# Altium PCB pcb.PcbDoc
Units mil, origin at the board's own origin, x right, y up, seen from the top; angles counter-clockwise.
Board outline 2952.76 x 2952.76 mil, 4 copper layers (Top Layer, GND, Int, Bottom Layer), stack 63.233 mil thick; 94 components, 54 nets, 351 pads, 69 vias.
Unrouted connection lines stored in the file: 112.
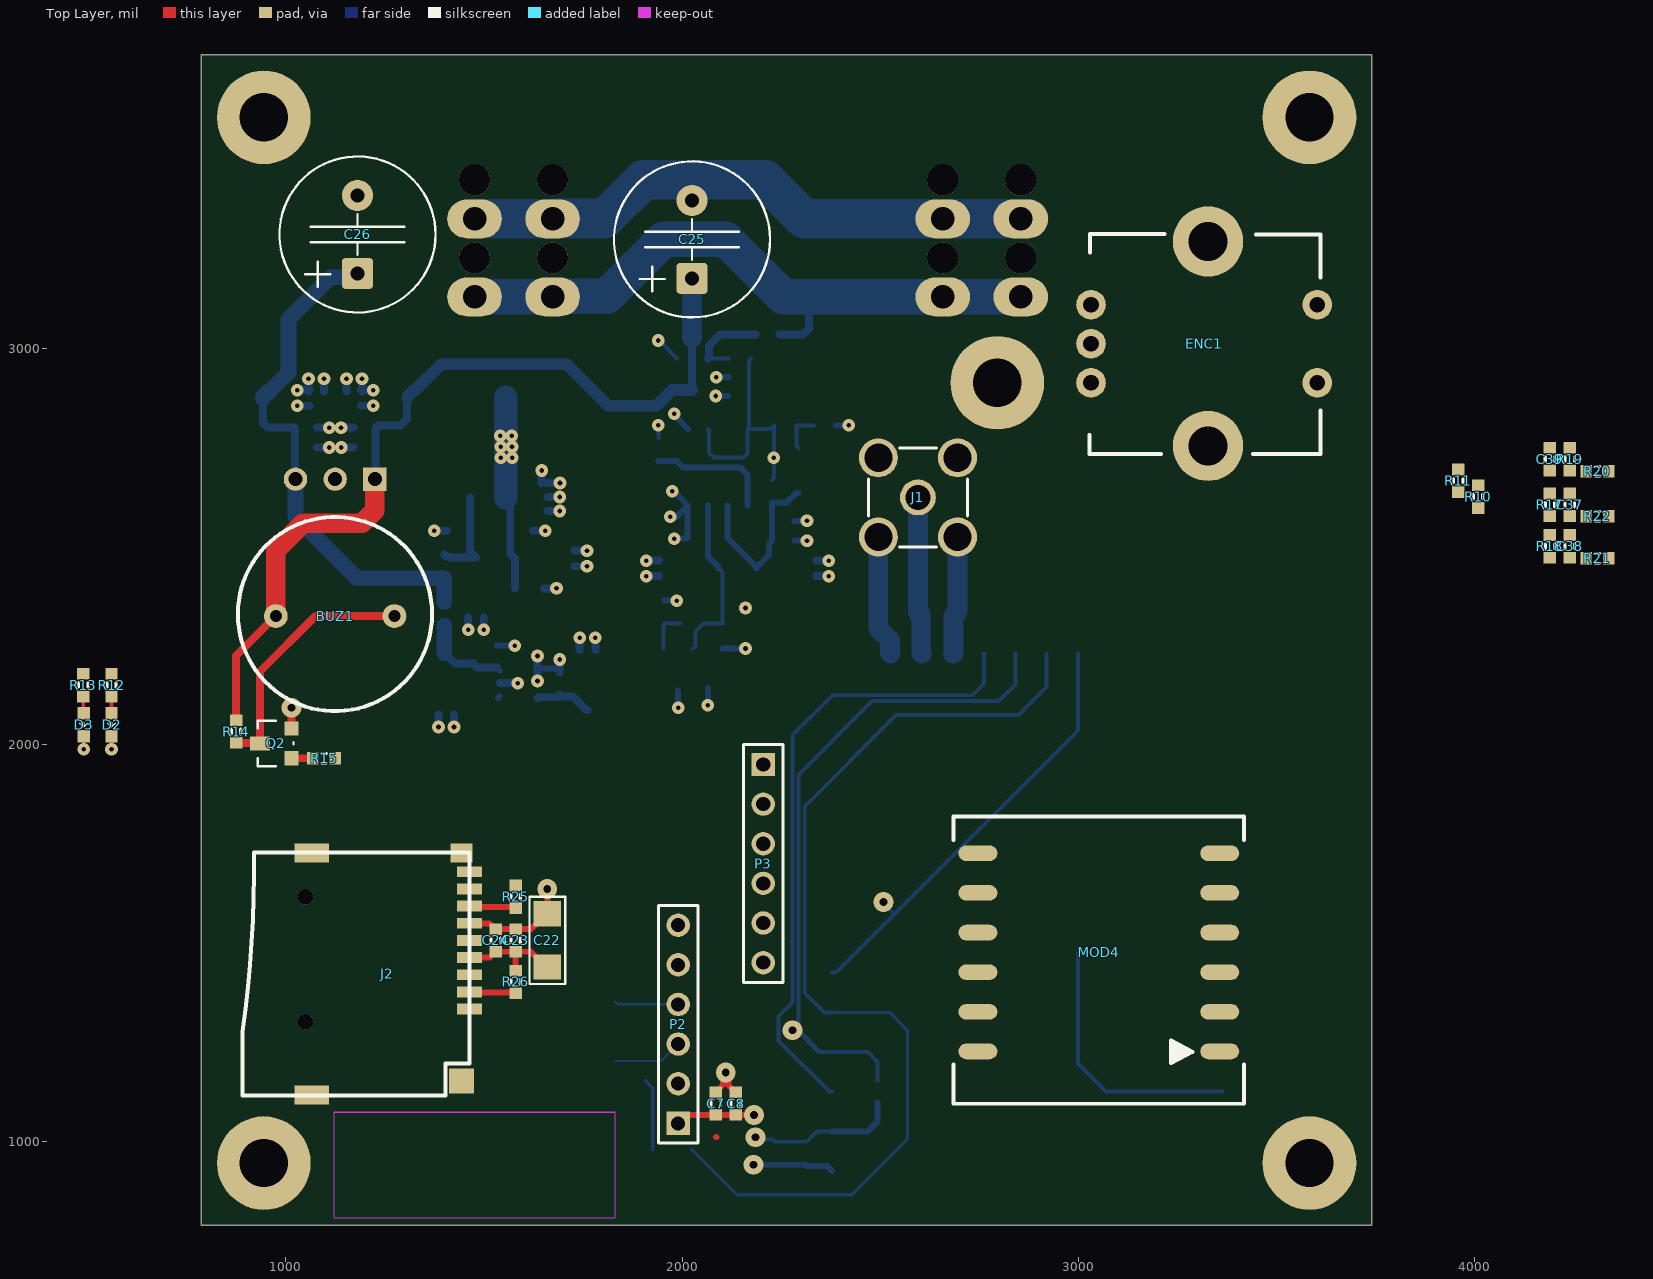
[diagram p0: Top Layer view]
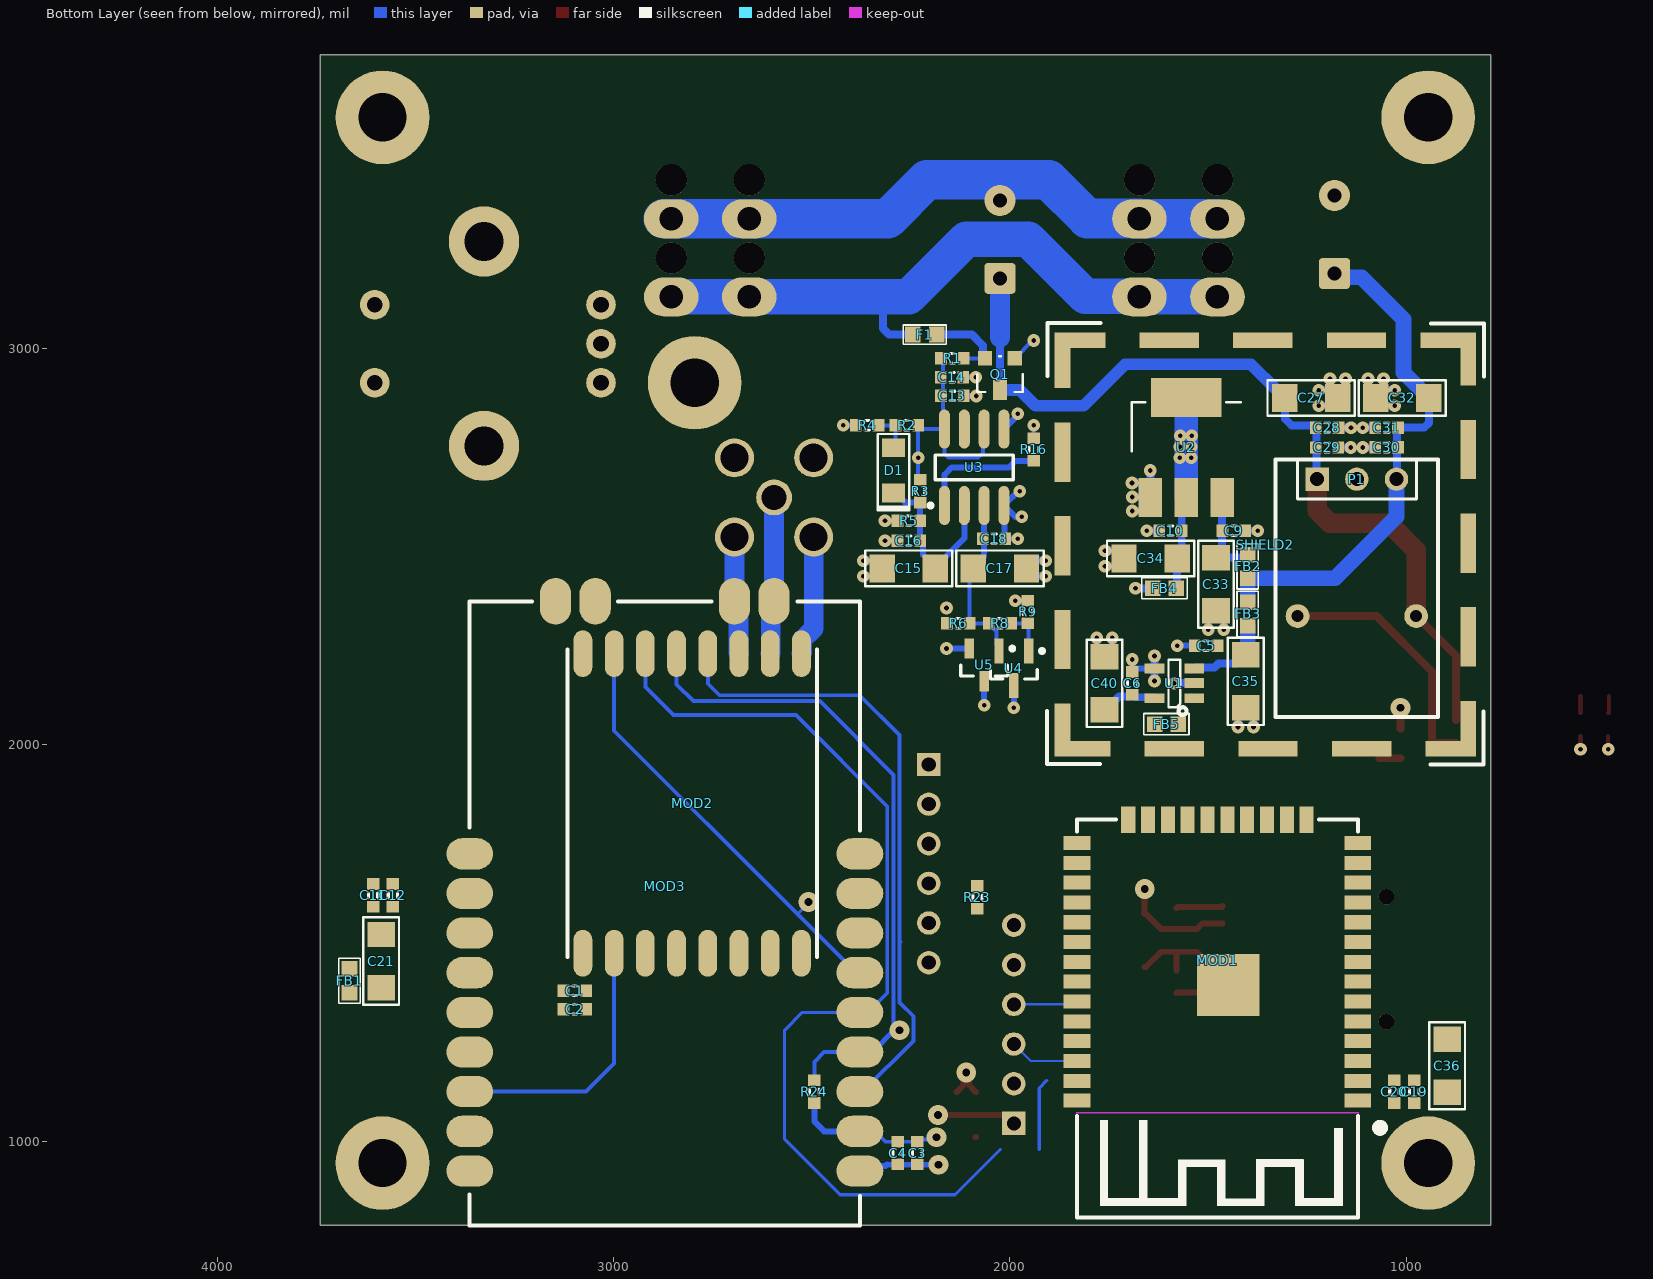
[diagram p1: Bottom Layer view, seen from below]
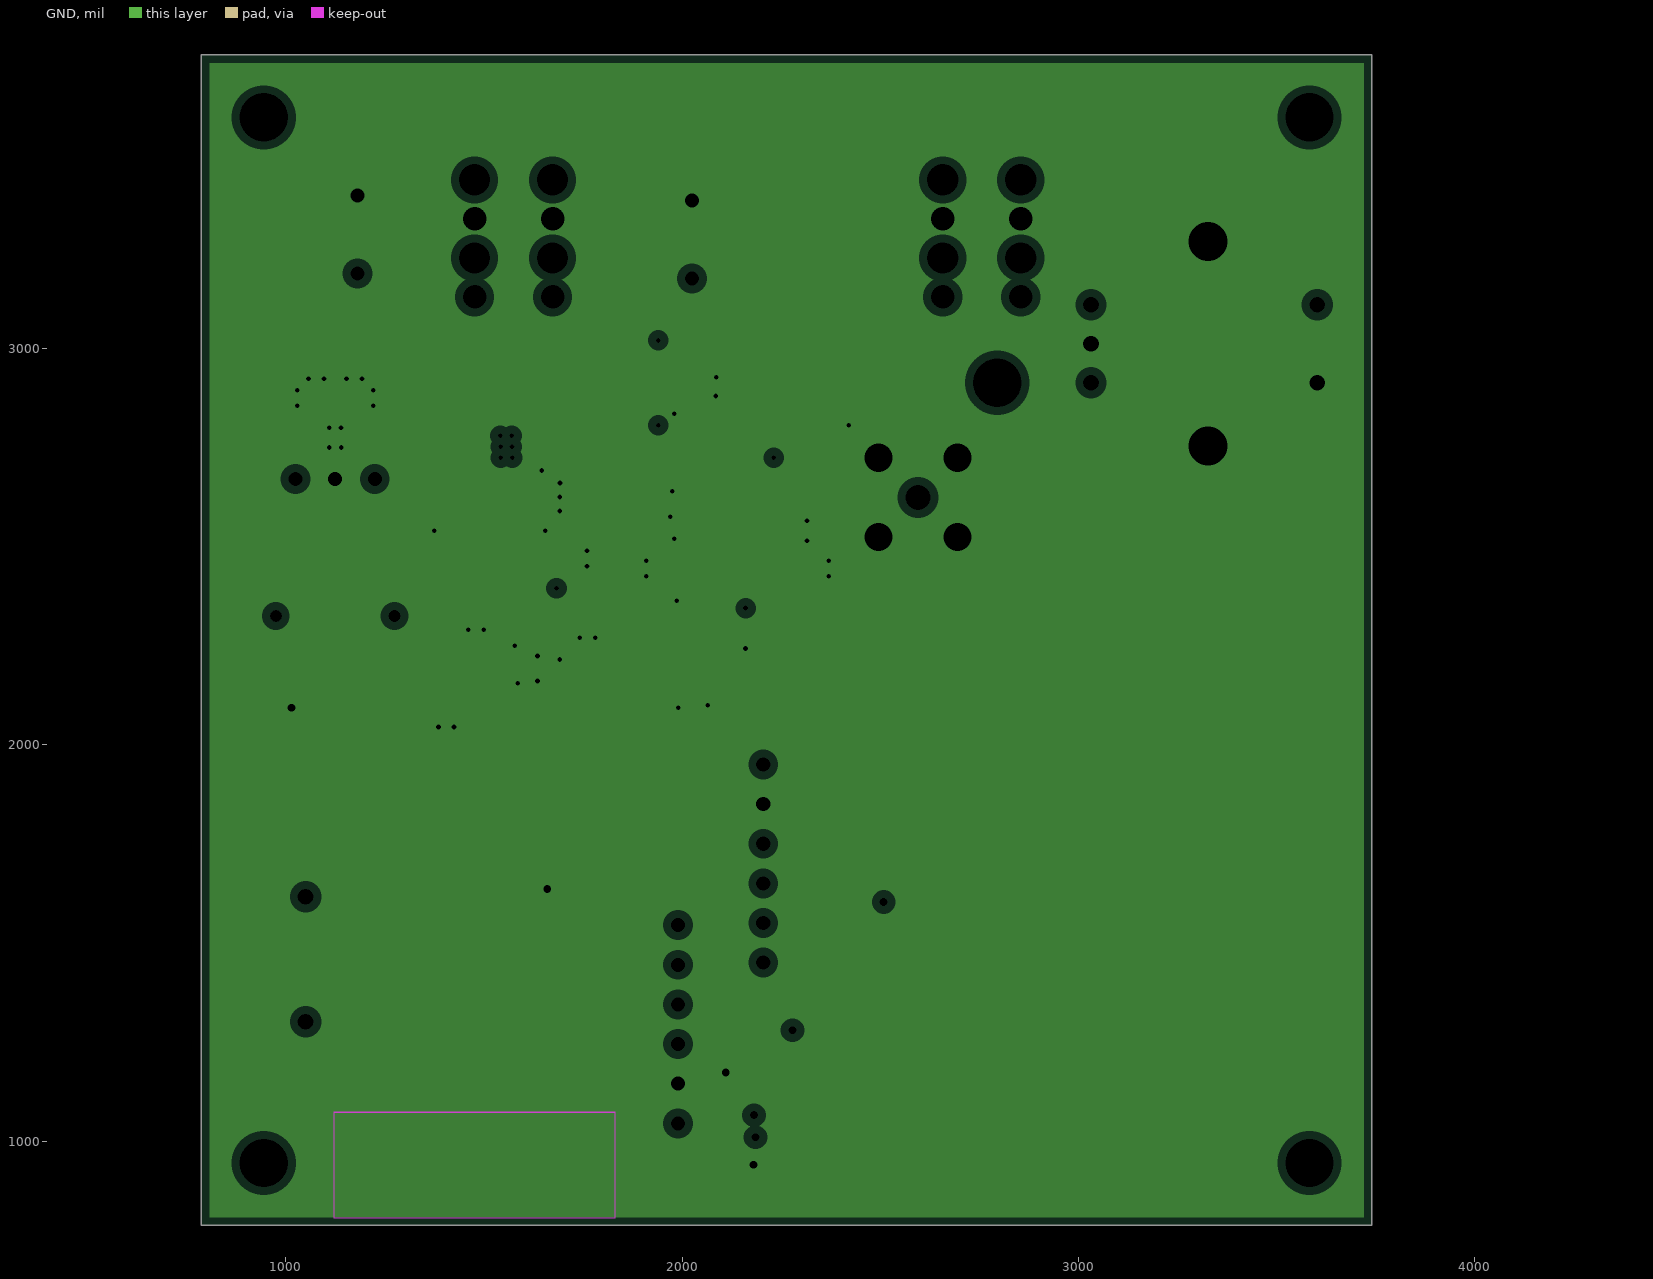
[diagram p2: GND, clearances drawn from the general rule]
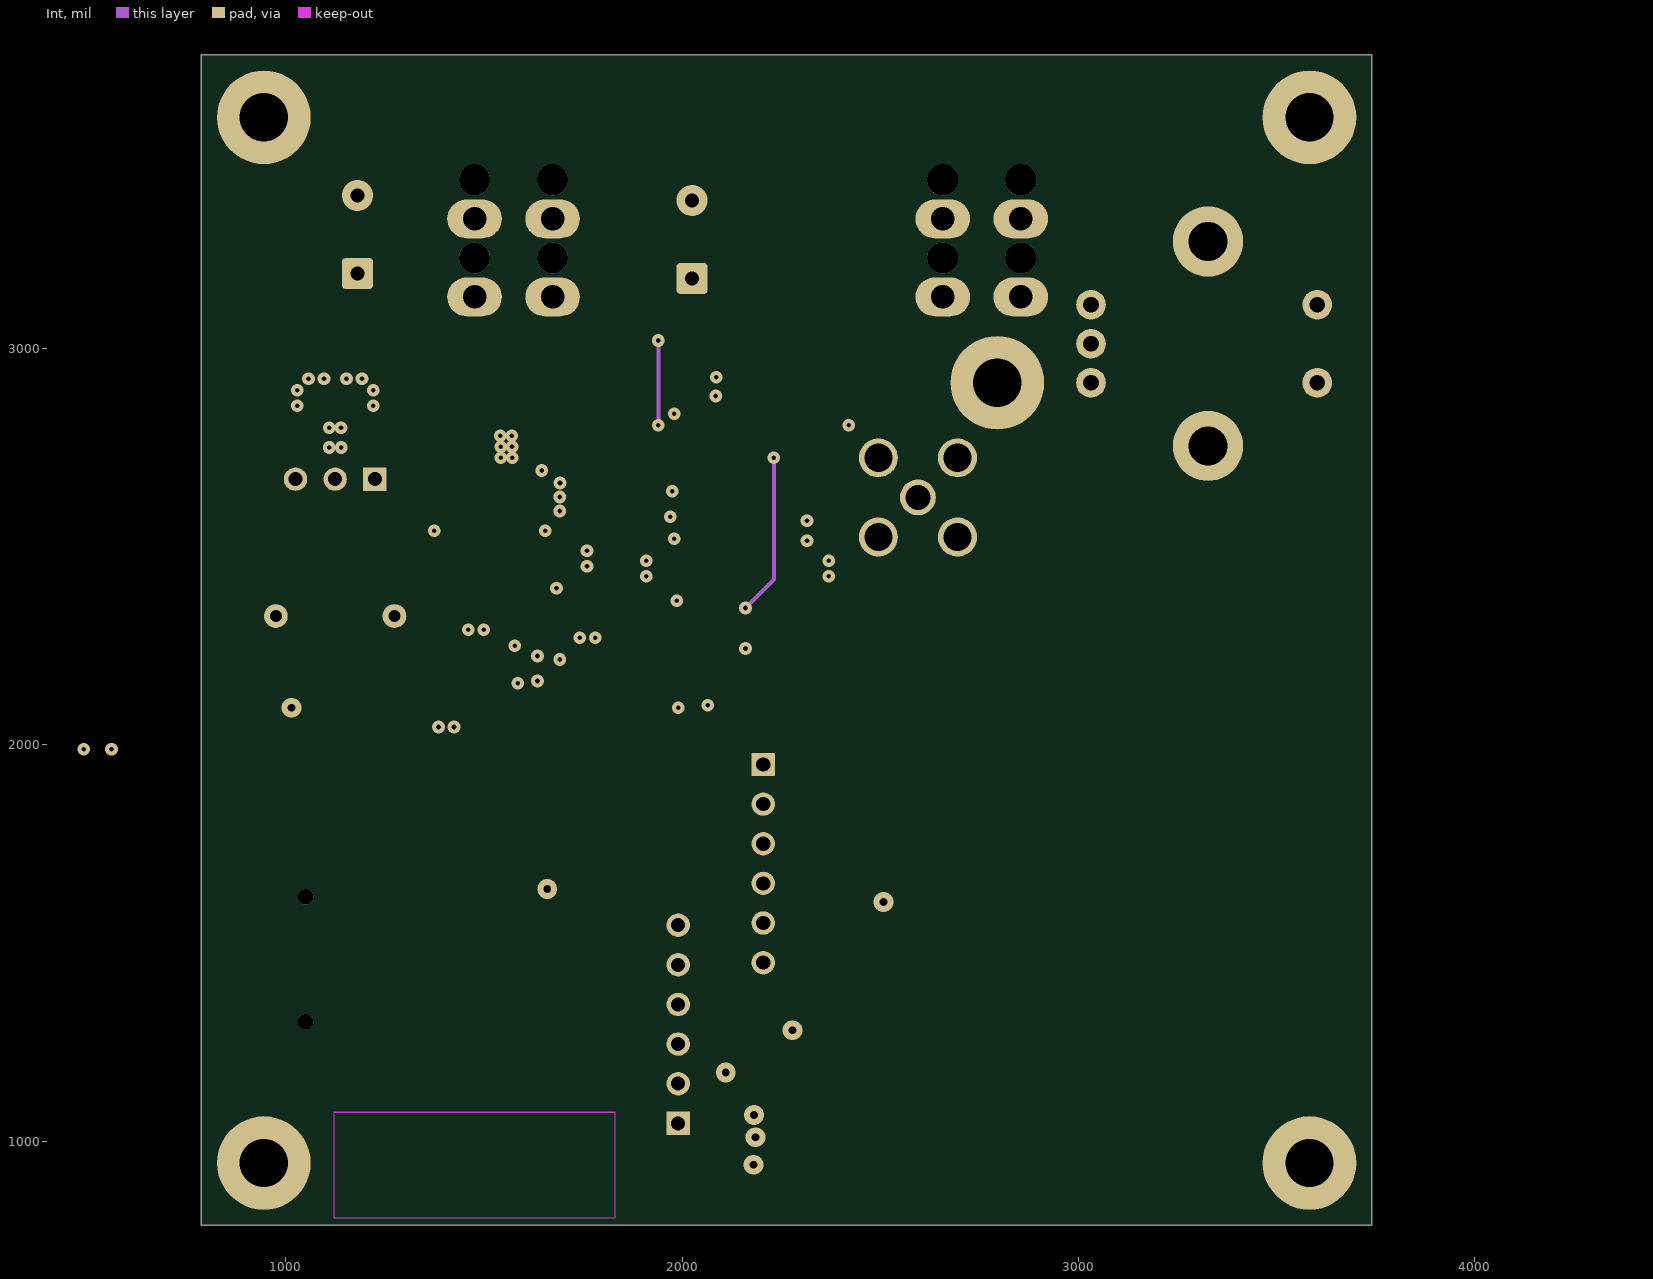
[diagram p3: Int]

## Layer stack, top to bottom
Top Solder: solder mask 0.4, Solder Resist, Dk 3.5
Top Layer: signal copper 1.4
Dielectric 2: prepreg 7.874, PP-006, Dk 4.1
GND: plane copper 1.378, net GND
Dielectric 3: prepreg 41.9291, PP-006, Dk 4.1
Int: signal copper 1.378
Dielectric 1: dielectric 7.874, FR-4, Dk 4.8
Bottom Layer: signal copper 1.4
Bottom Solder: solder mask 0.4, Solder Resist, Dk 3.5

## Board outline
787.4,787.4 3740.16,787.4 3740.16,3740.16 787.4,3740.16

## Design rules (kind name [scope] priority, off if disabled: settings)
BoardOutlineClearance [OnBottomLayer  Or OnTopLayer] p1: gap=11.81 ignorepadtopadclearanceinfootprint=FALSE
Clearance [All] p1: gap=5 ignorepadtopadclearanceinfootprint=TRUE except(10: Arc-Poly Track-Poly SMDPad-Poly THPad-Poly Via-Poly Fill-Poly Poly-Poly Poly-Region Poly-Text Poly-Hole)
ComponentClearance [InComponent('MOD2')] p1: gap=0 collisioncheckmode=3 verticalgap=0 showdistances=FALSE
ComponentClearance ComponentClearance_2 [InComponent('MOD3')] p2: gap=0 collisioncheckmode=3 verticalgap=0 showdistances=FALSE
ComponentClearance ComponentClearance_1 [All] p3: gap=10 collisioncheckmode=3 verticalgap=10 showdistances=FALSE
Height [All] p1: minheight=0 maxheight=1500 prefheight=500
HoleSize [All] p1: absolutevalues=TRUE maxlimit=100 minlimit=11.81 maxpercent=80.000 minpercent=20.000
MinimumAnnularRing [All] p1: minimumring=6
MinimumSolderMaskSliver [All] p1: minsoldermaskwidth=0
PlaneClearance [All] p1: clearance=20
PlaneConnect [All] p1: planeconnectstyle=Direct reliefexpansion=20 reliefentries=4 reliefconductorwidth=10 reliefairgap=10
PolygonConnect [All] p1: connectstyle=Direct reliefconductorwidth=10 reliefentries=4 polygonreliefangle="90 Angle" airgapwidth=10
RoutingVias [All] p1: holewidth=11.81 width=32 viastyle="Through Hole" minholewidth=11.81 minwidth=32 maxholewidth=19.68 maxwidth=100
SilkToSilkClearance [All] p1: silktosilkclearance=0
SilkToSolderMaskClearance [IsPad] p1: minsilkscreentomaskgap=0 clearancetoexposedcopper=TRUE
SolderMaskExpansion [All] p1: expansion=4 istentingtop=FALSE
Width [All] p1: maxlimit=1000 minlimit=5 preferedwidth=10 minimp=50.000000 maximp=50.000000 favimp=50.000000
22 further rules are at their usual default settings.

## Classes and differential pairs
component class power: C5 C6 C9 C10 C13 C14 C15 C16 C17 C18 C25 C26 C27 C28 C29 C30 C31 C32 C33 C34 C35 C40 D1 F1 FB2 FB3 FB4 FB5 P1 Q1 R1 R2 R3 R4 R5 R6 R8 R9 R16 SHIELD1 SHIELD2 U1 U2 U3 U4 U5
component class main: BUZ1 C1 C2 C3 C4 C7 C8 C11 C12 C19 C20 C21 C22 C23 C24 C36 C37 C38 C39 D2 D3 ENC1 FB1 J1 J2 MOD1 MOD2 MOD3 MOD4 P2 P3 Q2 R10 R11 R12 R13 R14 R15 R17 R18 R19 R20 R21 R22 R23 R24 R25 R26

## Components (designator, comment, footprint, x,y, rotation, side; value= is the part's Value field where it differs from the comment)
BUZ1 "Buzzer" BUZ_BPT14X 1124.69,2324.76 r180 top value=BPT-14X
C1 "Ceramic X7R" C_0603_1608 3097.6,1378.94 r0 bottom value=1uF
C2 "Ceramic X7R" C_0603_1608 3097.6,1333.27 r0 bottom value=100nF
C3 "Ceramic X7R" C_0603_1608 2233.43,970 r270 bottom value=1uF
C4 "Ceramic X7R" C_0603_1608 2283.43,970 r270 bottom value=100nF
C5 "Ceramic X7R" C_0603_1608 1505,2250 r0 bottom value=1uF
C6 "Ceramic X7R" C_0603_1608 1691.31,2155 r90 bottom value=1uF
C7 "Ceramic X7R" C_0603_1608 2085,1095 r90 top value=100nF
C8 "Ceramic X7R" C_0603_1608 2135,1095 r90 top value=1uF
C9 "Ceramic X7R" C_0603_1608 1435,2540 r180 bottom value=1uF
C10 "Ceramic X7R" C_0603_1608 1595,2540 r0 bottom value=1uF
C11 "Ceramic X7R" C_0603_1608 3606.46,1620.04 r90 bottom value=1uF
C12 "Ceramic X7R" C_0603_1608 3556.46,1620.04 r90 bottom value=100nF
C13 "Ceramic X7R" C_0603_1608 2145,2880 r180 bottom value=1uF
C14 "Ceramic X7R" C_0603_1608 2146.18,2927.56 r180 bottom value=100nF
C15 "Ceramic X7R" C_1206_3216 2255,2445 r0 bottom value=10uF
C16 "Ceramic X7R" C_0603_1608 2255,2515 r0 bottom value=1uF
C17 "Ceramic X7R" C_1206_3216 2025,2445 r180 bottom value=10uF
C18 "Ceramic X7R" C_0603_1608 2040,2520 r180 bottom value=1uF
C19 "Ceramic X7R" C_0603_1608 980,1125 r270 bottom value=1uF
C20 "Ceramic X7R" C_0603_1608 1030,1125 r270 bottom value=100nF
C21 "Ceramic X7R" C_1206_3216 3586.02,1454.49 r270 bottom value=10uF
C22 "Ceramic X7R" C_1206_3216 1660,1506.42 r90 top value=10uF
C23 "Ceramic X7R" C_0603_1608 1580,1506.42 r90 top value=1uF
C24 "Ceramic X7R" C_0603_1608 1530,1506.42 r90 top value=100nF
C25 "Electrolytic Capacitor" C_10x16x5 2025,3275 r90 top value=680uF
C26 "Electrolytic Capacitor" C_10x16x5 1181.1,3287.4 r90 top value=680uF
C27 "Ceramic X7R" C_1206_3216 1240,2875 r180 bottom value=10uF
C28 "Ceramic X7R" C_0603_1608 1199.69,2800.16 r180 bottom value=1uF
C29 "Ceramic X7R" C_0603_1608 1200,2750 r180 bottom value=100nF
C30 "Ceramic X7R" C_0603_1608 1049.69,2750.16 r0 bottom value=100nF
C31 "Ceramic X7R" C_0603_1608 1049.69,2800.16 r0 bottom value=1uF
C32 "Ceramic X7R" C_1206_3216 1010,2875 r0 bottom value=10uF
C33 "Ceramic X7R" C_1206_3216 1480,2405 r270 bottom value=10uF
C34 "Ceramic X7R" C_1206_3216 1645,2470 r0 bottom value=10uF
C35 "Ceramic X7R" C_1206_3216 1405,2160 r270 bottom value=10uF
C36 "Ceramic X7R" C_1206_3216 896.92,1190.19 r270 bottom value=10uF
C37 "Ceramic C0G" C_0603_1608 4239.13,2605.59 r90 top value=1nF
C38 "Ceramic C0G" C_0603_1608 4239.13,2500.59 r90 top value=1nF
C39 "Ceramic C0G" C_0603_1608 4189.13,2720.59 r90 top value=1nF
C40 "Ceramic X7R" C_1206_3216 1761.31,2155 r90 bottom value=10uF
D1 "BAS40H" SOD123 2293.54,2692.09 r90 bottom value=BAS40H,115
D2 "Green Led" OL_0603_1608 560.51,2050.58 r90 top value=LTST-C190TGKT
D3 "Red Led" OL_0603_1608 490.51,2050.58 r90 top value=LTST-C190KRKT
ENC1 "ENCODER" PEC12R-4xxxF-Sxxxx 3326.77,3011.81 r270 top value=PEC12R-4025F-S0024
F1 "Fuse" F_0603_1608 2215,3035 r180 bottom value=SF-0603F050-2
FB1 "Ferrite bead" FB_0603_1608 3666.02,1404.49 r90 bottom value=BLM18AG601SN1
FB2 "Ferrite bead" FB_0603_1608 1400,2450 r90 bottom value=BLM18AG601SN1
FB3 "Ferrite bead" FB_0603_1608 1400,2330 r270 bottom value=BLM18AG601SN1
FB4 "Ferrite bead" FB_0603_1608 1610,2395 r0 bottom value=BLM18AG601SN1
FB5 "Ferrite bead" FB_0603_1608 1605.08,2051.94 r180 bottom value=BLM18AG601SN1
J1 "SMA VERTICAL" J_SMA_VERTICAL 2594.96,2624.02 r270 top value=901-144-8RFX
J2 "SH-BI-270" PCB-mlvdq0q3kywtagbkwbjh-1 1050,1459.17 r270 top
MOD1 "2.4 GHz Wi-Fi-and-Bluetooth combo chip" MOD_ESP_WROOM_32 1476.38,1427.36 r0 bottom value=ESP32-WROOM-32
MOD2 "868 MHz RFM69HW RF Sub-GHz Transceiver Module" MOD_RFM69HW 2801.54,1852.05 r90 bottom locked value=RFM69HW-868S2
MOD3 "1W 868 MHz LoRa" MOD_E19-868M30S 2378.43,925 r90 bottom locked value=E19-868M30S
MOD4 "GPS with Patch antenna" MOD_L86-M33 3051.18,1476.38 r0 top value=L86-M33
P1 "Goldpin" P_HEADER_1x3_2.54 1224.69,2670.16 r180 bottom value=DS1021-1*3SF1-1
P2 "Goldpin" P_HEADER_1x6_2.54 1990,1045 r90 top value=DS1021-1*6SF1-1
P3 "Goldpin" P_HEADER_1x6_2.54 2204.72,1950.39 r270 top value=DS1021-1*6SF1-1
Q1 "DMG2307L" SOT23_TO236_SC59 2025,2935 r0 bottom
Q2 "2N7002K-7" SOT23_TO236_SC59 974.76,2003.46 r90 top
R1 "Resistor" R_0603_1608 2145,2975 r180 bottom value=10R
R2 "Resistor" R_NC_0603_1608 2260,2805.91 r180 bottom value=NC
R3 "Resistor" R_NC_0603_1608 2226.46,2640 r90 bottom value=NC
R4 "Resistor" R_NC_0603_1608 2360,2805.91 r180 bottom value=NC
R5 "Resistor" R_NC_0603_1608 2255,2565 r180 bottom value=NC
R6 "Resistor" R_NC_0603_1608 2130,2306.46 r0 bottom value=NC
R8 "Resistor" R_NC_0603_1608 2025,2306.46 r0 bottom value=NC
R9 "Resistor" R_NC_0603_1608 1955,2335 r270 bottom value=NC
R10 "Resistor" R_0603_1608 4007.83,2626.1 r270 top value=10k
R11 "Resistor" R_0603_1608 3957.83,2666.1 r90 top value=10k
R12 "Resistor" R_0603_1608 560.51,2150.58 r90 top value=1k
R13 "Resistor" R_0603_1608 489.21,2150.58 r90 top value=1k
R14 "Resistor" R_0603_1608 874.76,2033.46 r90 top value=1k
R15 "Resistor" R_0603_1608 1096.67,1965.96 r180 top value=100R
R16 "Resistor" R_0603_1608 1940,2745 r90 bottom value=100R
R17 "Resistor" R_0603_1608 4189.13,2605.59 r270 top value=10k
R18 "Resistor" R_0603_1608 4189.13,2500.59 r270 top value=10k
R19 "Resistor" R_0603_1608 4239.13,2720.59 r270 top value=10k
R20 "Resistor" R_0603_1608 4309.13,2690.59 r180 top value=100R
R21 "Resistor" R_0603_1608 4309.13,2470.59 r180 top value=100R
R22 "Resistor" R_0603_1608 4309.13,2577.05 r180 top value=100R
R23 "Resistor" R_0603_1608 2081.89,1615 r270 bottom value=10k
R24 "Resistor" R_0603_1608 2493.43,1125 r90 bottom value=10k
R25 "Resistor" R_0603_1608 1580,1616.65 r270 top value=10k
R26 "Resistor" R_0603_1608 1580,1401.69 r270 top value=10k
SHIELD1 "EMI Shield Cover" BMI-S-203-C 4681.1,5901.57 r0 top value=BMI-S-203-C
SHIELD2 "EMI Shield" BMI-S-203-F 1355.28,2508.5 r0 bottom locked value=BMI-S-203-F
U1 "LP5907MFX-3.0" SOT23-5_SC74A_SOT753_M 1585,2155 r90 bottom value=LP5907MFX-3.0/NOPB
U2 "LD1117AS33TR" SOT223_SC73 1555,2750 r180 bottom
U3 "TS3702CDT" SOP8_SO8_SOIC8_4X5X18 2090,2700 r90 bottom
U4 "LM4041CIM3-ADJ/NOPB" MF03A_M 1990,2193.31 r270 bottom
U5 "LM4041AIM3-1.2/NOPB" MF03A_N 2064.86,2201.36 r270 bottom

## Footprints (in the part's own frame and the unit in brackets; to place one, negate y for a bottom-side part, rotate by r counter-clockwise, add the part's x,y. Pads: shape width x height; smd on the part's side, far side on the other; paste and mask are expansions set on the pad)
BMI-S-203-C [mil]
  body extent -525,-525 525,525, height 39
BMI-S-203-F [mm]
  rect 1x3.24 smd: 1(-13.005,-11.72) 1(13.005,11.885)
  rect 1x3.8 smd: 1(-13.005,-6) 1(-13.005,0) 1(-13.005,6) 1(13.005,-5.835) 1(13.005,0.165) 1(13.005,6.165)
  rect 1x3.57 smd: 1(-13.005,11.885) 1(13.005,-11.72)
  rect 3.24x1 smd: 1(-11.885,13.17) 1(11.885,-13.005)
  rect 3.57x1 smd: 1(-11.72,-13.005) 1(11.72,13.17)
  rect 3.8x1 smd: 1(-6.165,13.17) 1(-5.835,-13.005) 1(-0.165,13.17) 1(0.165,-13.005) 1(5.835,13.17) 1(6.165,-13.005)
  silkscreen extent -14,-14.1 14,14.17, body extent -13.06,-13.06 13.15,13.15, height 5.08
BUZ_BPT14X [mil] "buzzer"
  round 60 hole 30: 1(149.61,0) 2(-149.61,0)
  silkscreen extent -245,-250 245,240, body extent -235,-236 238,236, height 295
C_10x16x5 [mm]
  rrect25% 2x2 hole 0.9: 1(-2.5,0)
  round 2 hole 0.9: 2(2.5,0)
  silkscreen extent -5,-5 5,5, body extent -4.96,-4.97 4.95,4.96, height 20
C_0603_1608 [mm]
  rect 0.75x0.8 smd: 1(-0.725,0) 2(0.725,0)
  silkscreen extent -0.15,-0.3 0.15,0.3, body extent -0.85,-0.45 0.85,0.45, height 0.89
C_1206_3216 [mil]
  rect 64x70 smd: 1(-67,0) 2(67,0)
  silkscreen extent -110,-45 110,45, body extent -67,-35 67,35, height 39
F_0603_1608 [mil]
  rect 39x40 smd: 1(-30,0) 2(30,0)
  silkscreen extent -54,-24 54,24, body extent -31,-16 31,16, height 32
FB_0603_1608 [mil]
  rect 39x40 smd: 1(-30,0) 2(30,0)
  silkscreen extent -57,-27 57,27, body extent -34,-19 34,19, height 21
J_SMA_VERTICAL [mm]
  round 2.3 hole 1.6: 1(0,0)
  round 2.5 hole 1.8: 2(-2.54,2.54) 2(-2.54,-2.54) 2(2.54,2.54) 2(2.54,-2.54)
  silkscreen extent -3.18,-3.18 3.18,3.18, body extent -3.17,-3.17 3.18,3.18, height 9.5
MF03A_M [mm] "SOT23, 3-Leads, Body 2.9x1.3mm, Pitch 0.95mm, Lead Span 2.4mm, IPC Low Density"
  rect 1.6x0.6 smd: 1(-1.1,0.95) 2(-1.1,-0.95) 3(1.1,0)
  silkscreen extent -1.22,-1.5 0.7,1.92, body extent -0.7,-1.52 0.7,1.52, height 1.12
MF03A_N [mm] "SOT23, 3-Leads, Body 2.9x1.3mm, Pitch 0.95mm, Lead Span 2.4mm, IPC Medium Density"
  rect 1.3x0.6 smd: 1(-1.05,0.95) 2(-1.05,-0.95) 3(1.05,0)
  silkscreen extent -1.17,-1.5 0.7,1.92, body extent -0.7,-1.52 0.7,1.52, height 1.12
MOD_E19-868M30S [mm]
  oval 2x3 smd: 1(20.32,25) 2(17.78,25) 3(15.24,25) 4(12.7,25) 5(10.16,25) 6(7.62,25) 7(5.08,25) 8(2.54,25) 9(0,25) 10(0,0) 11(2.54,0) 12(5.08,0) 13(7.62,0) 14(10.16,0) 15(12.7,0) 16(15.24,0) 17(17.78,0) 18(20.32,0)
  oval 3x2 smd: 19(36.5,5.5) 20(36.5,8.04) 21(36.5,16.96) 22(36.5,19.5)
  silkscreen extent -3.5,0 36.5,25, body extent -3.5,0 36.5,25, height 5.45
MOD_ESP_WROOM_32 [mm] "Normal"
  rect 1.7x0.9 smd: 1(-9,8.255) 2(-9,6.985) 3(-9,5.715) 4(-9,4.445) 5(-9,3.175) 6(-9,1.905) 7(-9,0.635) 8(-9,-0.635) 9(-9,-1.905) 10(-9,-3.175) 11(-9,-4.445) 12(-9,-5.715) 13(-9,-6.985) 14(-9,-8.255) 25(9,-8.255) 26(9,-6.985) 27(9,-5.715) 28(9,-4.445) 29(9,-3.175) 30(9,-1.905) 31(9,-0.635) 32(9,0.635) 33(9,1.905) 34(9,3.175) 35(9,4.445) 36(9,5.715) 37(9,6.985) 38(9,8.255)
  rect 0.9x1.7 smd: 15(-5.715,-9.755) 16(-4.445,-9.755) 17(-3.175,-9.755) 18(-1.905,-9.755) 19(-0.635,-9.755) 20(0.635,-9.755) 21(1.905,-9.755) 22(3.175,-9.755) 23(4.445,-9.755) 24(5.715,-9.755)
  rect 4x4 smd: EP1(-0.7,0.845)
  Keep-Out Layer region: -9.024,15.75 9,15.75 9,9.024 -9.024,9.024
  Keep-Out Layer region: -9.012,15.75 9,15.75 9,9.012 -9.012,9.012
  Keep-Out Layer region: -9.026,15.75 9,15.75 9,9.026 -9.026,9.026
  Keep-Out Layer region: -9.024,15.75 9,15.75 9,9.024 -9.024,9.024
  Keep-Out Layer region: -9.012,15.75 9,15.75 9,9.012 -9.012,9.012
  Keep-Out Layer region: -9.026,15.75 9,15.75 9,9.026 -9.026,9.026
  Keep-Out Layer region: -9.024,15.75 9,15.75 9,9.024 -9.024,9.024
  Keep-Out Layer region: -9.012,15.75 9,15.75 9,9.012 -9.012,9.012
  Keep-Out Layer region: -9.026,15.75 9,15.75 9,9.026 -9.026,9.026
  silkscreen extent -10.67,-9.75 9,15.75, body extent -9.05,-9.77 9.02,15.77, height 3
MOD_L86-M33 [mm]
  oval 2.5x1 smd: 1(7.75,-6.35) 2(7.75,-3.81) 3(7.75,-1.27) 4(7.75,1.27) 5(7.75,3.81) 6(7.75,6.35) 7(-7.75,6.35) 8(-7.75,3.81) 9(-7.75,1.27) 10(-7.75,-1.27) 11(-7.75,-3.81) 12(-7.75,-6.35)
  silkscreen extent -9.3,-9.7 9.3,8.7, body extent -9.15,-9.7 9.25,8.7, height 7.05
MOD_RFM69HW [mm]
  oval 3x1.2 smd: 1(-9.6,7) 2(-9.6,5) 3(-9.6,3) 4(-9.6,1) 5(-9.6,-1) 6(-9.6,-3) 7(-9.6,-5) 8(-9.6,-7) 9(9.6,-7) 10(9.6,-5) 11(9.6,-3) 12(9.6,-1) 13(9.6,1) 14(9.6,3) 15(9.6,5) 16(9.6,7)
  silkscreen extent -9.85,-8 9.85,8, body extent -9.85,-8 9.85,8, height 1.9
OL_0603_1608 [mm]
  rect 0.8x0.8 smd: 1(-0.75,0) 2(0.75,0)
  silkscreen extent -0.15,-0.25 0.15,0.25, body extent -0.8,-0.4 0.8,0.4, height 0.75
P_HEADER_1x3_2.54 [mm] "Connector; Header; 3 Position, Male"
  rect 1.5x1.5 hole 0.9: 1(0,0)
  round 1.5 hole 0.9: 2(2.54,0) 3(5.08,0)
  silkscreen extent -1.27,-1.27 6.35,1.27, body extent -1.17,-1.25 6.45,1.25, height 8.2
P_HEADER_1x6_2.54 [mm] "Connector; Header; 6 Position, Male"
  rect 1.5x1.5 hole 0.9: 1(0,0)
  round 1.5 hole 0.9: 2(2.54,0) 3(5.08,0) 4(7.62,0) 5(10.16,0) 6(12.7,0)
  silkscreen extent -1.27,-1.27 13.97,1.27, body extent -1.17,-1.25 14.07,1.25, height 8.2
PCB-mlvdq0q3kywtagbkwbjh-1 [mm]
  round 1 hole 1: 1(-4,0) 1(4,0)
  rect 0.7x1.6 smd: 1(3.2,10.5) 2(2.1,10.5) 3(1,10.5) 4(-0.1,10.5) 6(-2.3,10.5) 7(-3.4,10.5) 8(-4.5,10.5) CD(-5.6,10.5)
  rect 0.7x1.6 smd mask+0.102: 5(-1.2,10.5)
  rect 1.2x2.2 smd: H(-6.8,0.4) H(8.7,0.4)
  rect 1.6x1.6 smd: H(7.8,10)
  rect 1.2x1.4 smd: S0(-6.8,10)
  silkscreen extent -6.83,-4.03 8.74,10.5, body extent -7.1,-5.89 9,11.31, height 2.2
PEC12R-4xxxF-Sxxxx [mm]
  round 1.9 hole 1: 1(-2.5,-7.5) 2(0,-7.5) 3(2.5,-7.5) 4(-2.5,7) 5(2.5,7)
  round 4.5 hole 2.5: EP1(6.55,0) EP2(-6.55,0)
  silkscreen extent -7.04,-7.59 7.06,7.21, body extent -7.98,-7.5 7,7.92, height 35.01
R_0603_1608 [mm]
  rect 0.75x0.8 smd: 1(-0.725,0) 2(0.725,0)
  silkscreen extent -0.15,-0.3 0.15,0.3, body extent -0.87,-0.47 0.88,0.48, height 0.54
R_NC_0603_1608 [mm]
  rect 0.75x0.8 smd: 1(-0.725,0) 2(0.725,0)
  silkscreen extent -0.15,-0.3 0.15,0.3, body extent -0.87,-0.47 0.88,0.48, height 0.54
SOD123 [mm]
  rect 1.2x1.5 smd: 1(-1.45,0) 2(1.45,0)
  silkscreen extent -2.57,-1.02 2.34,1.02, body extent -1.86,-0.81 1.84,0.79, height 1.27
SOP8_SO8_SOIC8_4X5X18 [mm]
  oval 2.5x0.7 smd: 1(-2.45,1.905) 2(-2.45,0.635) 3(-2.45,-0.635) 4(-2.45,-1.905) 5(2.45,-1.905) 6(2.45,-0.635) 7(2.45,0.635) 8(2.45,1.905)
  silkscreen extent -2.57,-2.5 0.8,2.93, body extent -3,-2.45 3,2.45, height 1.7
SOT23-5_SC74A_SOT753_M [mil]
  rect 25x50 smd: 1(-37.5,-50) 2(0.5,-50) 3(37.5,-50) 4(37.5,50) 5(-37.5,50)
  silkscreen extent -80,-30 60,15, body extent -56,-53 59,57, height 57
SOT23_TO236_SC59 [mil]
  rect 36x36 smd: 1(-37.5,-40) 2(37.5,-40)
  rect 36x50 smd: 3(0,40)
  silkscreen extent -57,-45 58,45, body extent -57,-55 57,55, height 51
SOT223_SC73 [mm]
  rect 1.5x2.5 smd: 1(-2.3,-3.2) 2(0,-3.2) 3(2.3,-3.2)
  rect 4.5x2.5 smd: 4(0,3.2)
  silkscreen extent -3.5,-0.25 3.5,2.9, body extent -3.36,-3.55 3.34,3.75, height 1.8

## Part data
BUZ1: library part BUZ_BPT14X, Current=7mA, Manufacturer=Bestar, Manufacturer Part Number=BPT-14X, Voltage=3-16VDC, HelpURL=https://www.tme.eu/Document/2f32f2e796b26d1790fa80b84c10e428/bpt1412xh7_5_040200.pdf, Part Number=BUZ_BPT14X, SCH_Footprint=13.8x7.6, Supplier 1=TME, Supplier 2="RS Components", Supplier 3=Farnell, Supplier 4=Mouser, Supplier 5=Digi-Key, Supplier Part Number 1=BPT-14X
C1 C3 C5 C6 C8 C9 C10 C11 C13 C16 C18 C19 C23 C28 C31: library part C_1uF_25V_X7R_0603_10, "Capacitor", Dielectric=X7R, Manufacturer=Samsung, Manufacturer Part Number=CL10B105KA8NNNC, Tolerance (%)=10, Voltage=25V, HelpURL=http://www.tme.eu/pl/Document/4a42202b32dab16128fe107dd69598cc/samsung-chip-cap.pdf, Part Number=C_1uF_25V_X7R_0603_10, SCH_Footprint=0603, Supplier 1=TME, Supplier 2="RS Components", Supplier 3=Farnell, Supplier 4=Mouser, Supplier 5=Digi-Key, Supplier Part Number 1=CL10B105KA8NNNC
C2 C4 C7 C12 C14 C20 C24 C29 C30: library part C_100nF_50V_X7R_0603_5, "Capacitor", Dielectric=X7R, Manufacturer=Samsung, Manufacturer Part Number=CL10B104JB8NNNC, Tolerance (%)=5, Voltage=50V, HelpURL=http://www.tme.eu/pl/Document/4a42202b32dab16128fe107dd69598cc/samsung-chip-cap.pdf, Part Number=C_100nF_50V_X7R_0603_5, SCH_Footprint=0603, Supplier 1=TME, Supplier 2="RS Components", Supplier 3=Farnell, Supplier 4=Mouser, Supplier 5=Digi-Key, Supplier Part Number 1=CL10B104JB8NNNC
C15 C17 C21 C22 C27 C32 C33 C34 C35 C36 C40: library part C_10uF_25V_X7R_1206_10, "Capacitor", Dielectric=X7R, Manufacturer="Samsung Electro-Mechanics", Manufacturer Part Number=CL31B106KAHNNNE, Tolerance (%)=10, Voltage=25V, HelpURL=http://www.tme.eu/pl/Document/4a42202b32dab16128fe107dd69598cc/samsung-chip-cap.pdf, Part Number=C_10uF_25V_X7R_1206_10, SCH_Footprint=1206, Supplier 1=TME, Supplier 2="RS Components", Supplier 3=Farnell, Supplier 4=Mouser, Supplier 5=Digi-Key, Supplier Part Number 1=CL31B106KAHNNNE
C25 C26: library part CE_680uF_16V_10x16x5_LESR_20, "Polarized Capacitor", Dielectric=AL2O3, Manufacturer=Panasonic, Manufacturer Part Number=EEUFC1C681, Tolerance (%)=20, Voltage=16V, HelpURL=http://www.tme.eu/pl/Document/03efc9a050846e2e56a9cbbb3a5dd471/EEUFC0J221.pdf, Part Number=CE_680uF_16V_10x16x5_LESR_20, SCH_Footprint=Rx10x16x5, Supplier 1=TME, Supplier 2="RS Components", Supplier 3=Farnell, Supplier 4=Mouser, Supplier 5=Digi-Key, Supplier Part Number 1=EEUFC1C681
C37 C38 C39: library part C_1nF_50V_C0G_0603_5, "Capacitor", Dielectric=C0G, Manufacturer=Samsung, Manufacturer Part Number=CL10C102JB8NNNC, Tolerance (%)=5, Voltage=50V, HelpURL=http://www.tme.eu/pl/Document/7da762c1dbaf553c64ad9c40d3603826/mlcc_samsung.pdf, Part Number=C_1nF_50V_C0G_0603_5, SCH_Footprint=0603, Supplier 1=TME, Supplier 2="RS Components", Supplier 3=Farnell, Supplier 4=Mouser, Supplier 5=Digi-Key, Supplier Part Number 1=CL10C102JB8NNNC
D1: library part DS_BAS40H_0.12A_40V_SOD123, Current=0.12A, Manufacturer=Nexperia, Manufacturer Part Number=BAS40H,115, Voltage=40V, HelpURL=https://datasheet.octopart.com/BAS40H%2C115-Nexperia-datasheet-8446890.pdf, Part Number=DS_BAS40H_0.12A_40V_SOD123, SCH_Footprint=SOD123, Supplier 1=TME, Supplier 2="RS Components", Supplier 3=Farnell, Supplier 4=Mouser, Supplier 5=Digi-Key, Supplier Part Number 2=7816723P, Supplier Part Number 3=1757749, Supplier Part Number 4=771-BAS40H-T/R, Supplier Part Number 5=1727-3562-1-ND
D2: library part OL_G_0603, "LED GREEN", Manufacturer=Lite-On, Manufacturer Part Number=LTST-C190TGKT, HelpURL=https://datasheet.octopart.com/LTST-C190TGKT-Lite-On-datasheet-158437.pdf, Part Number=OL_G_0603, SCH_Footprint=0603, Supplier 1=TME, Supplier 2="RS Components", Supplier 3=Farnell, Supplier 4=Mouser, Supplier 5=Digi-Key, Supplier Part Number 1=LTST-C190TGKT, Supplier Part Number 2=6920997P, Supplier Part Number 4=859-LTST-C190TGKT, Supplier Part Number 5=160-2019-1-ND
D3: library part OL_R_0603, "LED_RED", Manufacturer=Lite-On, Manufacturer Part Number=LTST-C190KRKT, HelpURL=https://datasheet.octopart.com/LTST-C190KRKT-Lite-On-datasheet-158191.pdf, Part Number=OL_R_0603, SCH_Footprint=0603, Supplier 1=TME, Supplier 2="RS Components", Supplier 3=Farnell, Supplier 4=Mouser, Supplier 5=Digi-Key, Supplier Part Number 1=LTST-C190KRKT, Supplier Part Number 2=1769795, Supplier Part Number 4=859-LTST-C190KRKT, Supplier Part Number 5=160-1436-1-ND
ENC1: library part ENC_PEC12R-4025F-S0024, Manufacturer=Bourns, Manufacturer Part Number=PEC12R-4025F-S0024, HelpURL=https://datasheet.octopart.com/PEC12R-4025F-S0024-Bourns-datasheet-44395047.pdf, Part Number=ENC_PEC12R-4025F-S0024, SCH_Footprint=PEC12R-4xxxF-Sxxxx, Supplier 1=TME, Supplier 2="RS Components", Supplier 3=Farnell, Supplier 4=Mouser, Supplier 5=Digi-Key, Supplier Part Number 1=PEC12R-4025F-S0024, Supplier Part Number 2=789-9649, Supplier Part Number 3=2814036, Supplier Part Number 4=652-PEC12R-4025F-S24, Supplier Part Number 5=PEC12R-4025F-S0024-ND
F1: library part F_500mA_50V_0603, Current=500mA, Manufacturer=Bourns, Manufacturer Part Number=SF-0603F050-2, Voltage=50V, HelpURL=https://datasheet.octopart.com/SF-0603F050-2-Bourns-datasheet-16972401.pdf, Part Number=F_500mA_50V_0603, SCH_Footprint=0603, Supplier 1=TME, Supplier 2="RS Components", Supplier 3=Farnell, Supplier 4=Mouser, Supplier 5=Digi-Key, Supplier Part Number 2=6924965P, Supplier Part Number 3=1652130, Supplier Part Number 5=SF-0603F050-2CT-ND
FB1 FB2 FB3 FB4 FB5: library part FB_BLM18AG601SN1, "Ferrite Bead", Current=500mA, Manufacturer=Murata, Manufacturer Part Number=BLM18AG601SN1D, Resistance=600R, HelpURL=http://datasheet.octopart.com/BLM18AG601SN1D-Murata-datasheet-11743096.pdf, Part Number=FB_BLM18AG601SN1, SCH_Footprint=0603, Supplier 1=TME, Supplier 2="RS Components", Supplier 3=Farnell, Supplier 4=Mouser, Supplier 5=Digi-Key, Supplier Part Number 2=7241299P, Supplier Part Number 3=1515679, Supplier Part Number 4=81-BLM11A601S, Supplier Part Number 5=490-1014-1-ND
J1: library part J_SMA_VERTICAL, "SMA connector", Manufacturer="Amphenol RF", Manufacturer Part Number=901-144-8RFX, Component Type=Standard, HelpURL=http://www.mouser.com/ds/2/18/C901-144-8RFX-710432.pdf, Part Number=J_SMA_VERTICAL, SCH_Footprint="SMA VERTICAL", Supplier 1=TME, Supplier 2="RS Components", Supplier 3=Farnell, Supplier 4=Mouser, Supplier 5=Digi-Key, Supplier Part Number 3=1339820, Supplier Part Number 4=523-901-144-8RFX, Supplier Part Number 5=ARFX1231-ND
J2: library part CMP-xyn8wfk4aykgkvbxxkv0-5, "SH-BI-270 Chinese microSD socket", CustomComponentID=xyn8wfk4aykgkvbxxkv0
MOD1: library part MOD_ESP32-WROOM-32, Manufacturer=ESPRESSIF, Manufacturer Part Number=ESP32-WROOM-32, HelpURL=https://www.espressif.com/sites/default/files/documentation/esp32_datasheet_en.pdf, Part Number=MOD_ESP32-WROOM-32, SCH_Footprint=MOD_ESP_WROOM_32, Supplier 1=TME, Supplier 2="RS Components", Supplier 3=Farnell, Supplier 4=Mouser, Supplier 5=Digi-Key, Supplier Part Number 1=ESP32-WROOM-32, Supplier Part Number 2=169-7594, Supplier Part Number 4=356-ESP-WROOM-32, Supplier Part Number 5=1904-1010-1-ND
MOD2: library part MOD_RFM69HW_868MHz, "HopeRF RFM69HW ISM TRANSCEIVER MODULE V1.3", Manufacturer=HopeRF, Manufacturer Part Number=RFM69HW-868S2, HelpURL=https://www.hoperf.com/data/upload/portal/20190306/RFM69HW-V1.3%20Datasheet.pdf, Part Number=MOD_RFM69HW_868MHz, SCH_Footprint=19.7x16, Supplier 1=TME, Supplier 2="RS Components", Supplier 3=Farnell, Supplier 4=Mouser, Supplier 5=Digi-Key, Supplier 6=Maritex, Supplier Part Number 1=RFM69HW-868S2, Supplier Part Number 3=2759293, Supplier Part Number 5=RFM69HW-868S2-ND, Supplier Part Number 6=RFM69HW-868S
MOD3: library part MOD_E19-868M30S, "SX1276 Wireless Module", Manufacturer=Ebyte, Manufacturer Part Number=E19-868M30S, HelpURL=http://www.ebyte.com/en/downpdf.aspx?id=222, Part Number=MOD_E19-868M30S, SCH_Footprint=40x25, Supplier 1=TME, Supplier 2="RS Components", Supplier 3=Farnell, Supplier 4=Mouser, Supplier 5=Digi-Key, Supplier 6=Ebyte, Supplier Part Number 6=E19-868M30S
MOD4: library part MOD_L86-M33, "GPS", Manufacturer=Quectel, Manufacturer Part Number=L86-M33, HelpURL=https://www.codico.com/shop/media/datasheets/Quectel_L86_Hardware_Design_V1.1.pdf, Part Number=MOD_L86-M33, SCH_Footprint=18.4x16, Supplier 1=TME, Supplier 2="RS Components", Supplier 3=Farnell, Supplier 4=Mouser, Supplier 5=Digi-Key, Supplier Part Number 2=9084114
P1: library part P_HEADER_1x3_2.54, "Header, 3-Pin", Manufacturer=Connfly, Manufacturer Part Number=DS1021-1*3SF1-1, Supplier Part Number 1=ZL201-03G, Component Type=Standard, HelpURL=http://www.tme.eu/en/Document/cc301e58a5da78cb543a94b5a5b7f06a/DS1021.pdf, Part Number=P_HEADER_1x3_2.54, SCH_Footprint="1x3 2.54mm", Supplier 1=TME, Supplier 2="RS Components", Supplier 3=Farnell, Supplier 4=Mouser, Supplier 5=Digi-Key
P2 P3: library part P_HEADER_1x6_2.54, "Header, 6-Pin", Manufacturer=Connfly, Manufacturer Part Number=DS1021-1*6SF1-1, Supplier Part Number 1=ZL201-06G, Component Type=Standard, HelpURL=http://www.tme.eu/en/Document/cc301e58a5da78cb543a94b5a5b7f06a/DS1021.pdf, Part Number=P_HEADER_1x6_2.54, SCH_Footprint="1x6 2.54mm", Supplier 1=TME, Supplier 2="RS Components", Supplier 3=Farnell, Supplier 4=Mouser, Supplier 5=Digi-Key
Q1: library part QP_DMG2307L, Current=3A, Manufacturer="Diodes Inc", Supplier Part Number 1=DMG2307L-7, Voltage=30, HelpURL=https://www.diodes.com/assets/Datasheets/DMG2307L.pdf, Manufacturer Part Number=DMG2307L, Part Number=QP_DMG2307L, SCH_Footprint=SOT23, Supplier 1=TME, Supplier 2="RS Components", Supplier 3=Farnell, Supplier 4=Mouser, Supplier 5=Digi-Key, Supplier Part Number 2=8222539, Supplier Part Number 3=3127316, Supplier Part Number 4=621-DMG2307L-7, Supplier Part Number 5=DMG2307L-7DICT-ND, Type=P-MOS
Q2: library part QN_2N7002K-7_60V_350mA, Current=0A8, Manufacturer="DIODES inc", Voltage=60V, HelpURL=http://datasheet.octopart.com/2N7002K-7-Diodes-Inc.-datasheet-12515815.pdf, Manufacturer Part Number=2N7002K-7, Part Number=QN_2N7002K-7_60V_350mA, SCH_Footprint=SOT23, Supplier 1=TME, Supplier 2="RS Components", Supplier 3=Farnell, Supplier 4=Mouser, Supplier 5=Digi-Key, Supplier Part Number 2=7703383, Supplier Part Number 3=1713825, Supplier Part Number 4=621-2N7002K-7, Supplier Part Number 5=2N7002K-7DICT-ND, Type=N-MOS
R1: library part R_10R_0603_1, Manufacturer=Royalohm, Manufacturer Part Number=0603SAF100JT5E, Power=100mW, Supplier Part Number 1=SMD0603-10R-1%, Tolerance=1%, Voltage=50V, HelpURL=http://www.tme.eu/pl/Document/b315665a56acbc42df513c99b390ad98/ROYALOHM-THICKFILM.pdf, Part Number=R_10R_0603_1, SCH_Footprint=0603, Supplier 1=TME, Supplier 2="RS Components", Supplier 3=Farnell, Supplier 4=Mouser, Supplier 5=Digi-Key
R2 R3 R4 R5 R6 R8 R9: library part R_GENERIC_0603, Part Number=R_GENERIC_0603, SCH_Footprint=0603, Supplier 1=TME, Supplier 2="RS Components", Supplier 3=Farnell, Supplier 4=Mouser, Supplier 5=Digi-Key
R10 R11 R17 R18 R19 R23 R24 R25 R26: library part R_10k_0603_1, Manufacturer=Vishay, Manufacturer Part Number=CRCW060310K0FKTABC, Power=100mW, Tolerance=1%, Voltage=75V, HelpURL=http://www.tme.eu/pl/Document/622e28308c06d160637f2b14751ba16b/Data%20Sheet%20CRCW_BCe3.pdf, Part Number=R_10k_0603_1, SCH_Footprint=0603, Supplier 1=TME, Supplier 2="RS Components", Supplier 3=Farnell, Supplier 4=Mouser, Supplier 5=Digi-Key, Supplier Part Number 1=CRCW060310K0FKTABC, Supplier Part Number 4=667-ERJ-3EKF1002V, Supplier Part Number 5=P10KGCT-ND
R12 R13 R14: library part R_1k_0603_1, Manufacturer=Vishay, Manufacturer Part Number=CRCW06031K00FKEA, Power=100mW, Tolerance=1%, Voltage=75V, HelpURL=http://www.farnell.com/datasheets/2310790.pdf?_ga=2.256888843.1690599162.1548417389-1379097396.1542296996&_gac=1.262631934.1547230258.Cj0KCQiAmuHhBRD0ARIsAFWyPwhX8HcvXnM3tA0ZBodZLzDIjH2ZxLpjT5LWo9bad_HPRbU8LfPq44UaAhEwEALw_wcB, Part Number=R_1k_0603_1, SCH_Footprint=0603, Supplier 1=TME, Supplier 2="RS Components", Supplier 3=Farnell, Supplier 4=Mouser, Supplier 5=Digi-Key, Supplier Part Number 2=678-9875P, Supplier Part Number 3=1469740, Supplier Part Number 4=71-CRCW0603-1.0K-E3, Supplier Part Number 5=541-1.00KHCT-ND
R15 R16 R20 R21 R22: library part R_100R_0603_1, Manufacturer=Yageo, Manufacturer Part Number=RC0603FR-07100RL, Power=100mW, Supplier Part Number 1=RC0603FR-07100R, Tolerance=1%, Voltage=50V, HelpURL=http://www.tme.eu/en/Document/d2a72e545e5c8eb7bf2a04fa97535928/rc0603yageo.pdf, Part Number=R_100R_0603_1, SCH_Footprint=0603, Supplier 1=TME, Supplier 2="RS Components", Supplier 3=Farnell, Supplier 4=Mouser, Supplier 5=Digi-Key, Supplier Part Number 3=2131804, Supplier Part Number 4=603-RC0603FR-07100RL, Supplier Part Number 5=311-100HRCT-ND
SHIELD1: library part SHIELD_BMI-S-203-C, "Shield, 1 pad", Manufacturer=Laird, Manufacturer Part Number=BMI-S-203-C, HelpURL=https://media.digikey.com/pdf/Data%20Sheets/Laird%20Technologies/BMI-S-203.pdf, Part Number=SHIELD_BMI-S-203-C, SCH_Footprint=26.21x26.21x2mm, Supplier 1=TME, Supplier 2="RS Components", Supplier 3=Farnell, Supplier 4=Mouser, Supplier 5=Digi-Key, Supplier Part Number 3=2497718, Supplier Part Number 4=739-BMIS-203-C, Supplier Part Number 5=903-1015-ND
SHIELD2: library part SHIELD_BMI-S-203-F, "Shield, 1 pad", Manufacturer=Laird, Manufacturer Part Number=BMI-S-203-F, HelpURL=https://media.digikey.com/pdf/Data%20Sheets/Laird%20Technologies/BMI-S-203.pdf, Part Number=SHIELD_BMI-S-203-F, SCH_Footprint=26.21x26.21x5.08mm, Supplier 1=TME, Supplier 2="RS Components", Supplier 3=Farnell, Supplier 4=Mouser, Supplier 5=Digi-Key, Supplier Part Number 3=2497719, Supplier Part Number 4=739-BMIS-203-F, Supplier Part Number 5=903-1052-1-ND
U1: library part VL_LP5907MFX-3.0, "ultra low noise LDO", Current=0A25, Manufacturer="Texas Instruments", Manufacturer Part Number=LP5907MFX-3.0/NOPB, Voltage=3V, HelpURL=http://www.ti.com/lit/ds/symlink/lp5907.pdf, Part Number=VL_LP5907MFX-3.0, SCH_Footprint=SOT23-5, Supplier 1=TME, Supplier 2="RS Components", Supplier 3=Farnell, Supplier 4=Mouser, Supplier 5=Digi-Key, Supplier Part Number 3=2492303, Supplier Part Number 4=595-LP5907MFX-3.0NPB, Supplier Part Number 5=296-40357-1-ND
U2: library part VL_LD1117AS33TR_3V3_1A2, "Low-Dropout Positive Voltage Regulator", Current=1A2, Manufacturer=STMicroelectronics, Supplier Part Number 1=LD1117AS33, Voltage=3.3V, HelpURL=http://www.tme.eu/pl/Document/bad00e7fc591b73ff810af309b2bb7a4/LD1117A.pdf, Manufacturer Part Number=LD1117AS33TR, Part Number=VL_LD1117AS33TR_3V3_1A2, SCH_Footprint=SOT223, Supplier 1=TME, Supplier 2="RS Components", Supplier 3=Farnell, Supplier 4=Mouser, Supplier 5=Digi-Key, Supplier Part Number 3=1467776, Supplier Part Number 4=LD1117AS33, Supplier Part Number 5=497-1228-1-ND
U3: library part A2_TS3702CDT, Manufacturer=STMicroelectronics, HelpURL=https://www.st.com/resource/en/datasheet/ts3702.pdf, Manufacturer Part Number=TS3702CDT, Part Number=A2_TS3702CDT, SCH_Footprint=SOIC-8, Supplier 1=TME, Supplier 2="RS Components", Supplier 3=Farnell, Supplier 4=Mouser, Supplier 5=Digi-Key, Supplier Part Number 1=TS3702CDT, Supplier Part Number 3=2849881, Supplier Part Number 4=511-TS3702CDT, Supplier Part Number 5=497-6611-1-ND
U4: library part CMP-0074-00728-2, "Precision Micropower Shunt Voltage Reference, 3-pin SOT-23, Pb-Free", Manufacturer="National Semiconductor", PackageTopMarking=RAC*XTT, PowerWise=N, ComponentLink1Description="LM4041 Datasheet", ComponentLink1URL=http://www.national.com/ds/LM/LM4041.pdf, ComponentLink2Description="LM4041 Web Page", ComponentLink2URL=http://www.national.com/pf/LM/LM4041.html, ComponentLink3Description="MF03A Package Page", ComponentLink3URL=http://www.national.com/packaging/folders/mf03a.html, CompType="Voltage Reference IC", DatasheetVersion=Mar-2005, PackageDescription="Molded SOT-23, .115 x .051 x .037in Body, 3 Lead, .075 in Pitch", PackageReference=MF03A, PackageVersion="revB, Mar-2003", PinCount=3, RevisionNote="Component URLs added", RoHS=Y
U5: library part CMP-0074-00741-2, "Precision Micropower Shunt Voltage Reference, 3-pin SOT-23, Pb-Free", Manufacturer="National Semiconductor", PackageTopMarking=R1A*XTT, PowerWise=N, ComponentLink1Description="LM4041 Datasheet", ComponentLink1URL=http://www.national.com/ds/LM/LM4041.pdf, ComponentLink2Description="LM4041 Web Page", ComponentLink2URL=http://www.national.com/pf/LM/LM4041.html, ComponentLink3Description="MF03A Package Page", ComponentLink3URL=http://www.national.com/packaging/folders/mf03a.html, CompType="Voltage Reference IC", DatasheetVersion=Mar-2005, PackageDescription="Molded SOT-23, .115 x .051 x .037in Body, 3 Lead, .075 in Pitch", PackageReference=MF03A, PackageVersion="revB, Mar-2003", PinCount=3, RevisionNote="Component URLs added", RoHS=Y

## Free pads (board coordinates)
  oval 137.8x98.43 hole 59.06: 1(1476.38,3129.92) 1(1476.38,3326.77) 1(1673.23,3129.92) 1(1673.23,3326.77) 1(2657.48,3129.92) 1(2657.48,3326.77) 1(2854.33,3129.92) 1(2854.33,3326.77)
  round 78.74 hole 78.74 unplated: 1(1476.38,3228.35) 1(1476.38,3425.2) 1(1673.23,3228.35) 1(1673.23,3425.2) 1(2657.48,3228.35) 1(2657.48,3425.2) 1(2854.33,3228.35) 1(2854.33,3425.2)
  round 236.22 hole 122.05: 2(944.88,944.88) 2(944.88,3582.68) 2(2795.28,2913.39) 2(3582.68,944.88) 2(3582.68,3582.68)

## Via types
v1: diameter 32, hole 11.81, Top Layer to Bottom Layer, 61 vias
v2: diameter 50, hole 19.68, Top Layer to Bottom Layer, 8 vias

## Nets (pads, with @x,y where several pads share a name; then routed paths per layer and width w, separated by ;. In a path a pad name is that pad's centre, name@x,y a point inside that pad or via, vN(x,y) a via of type N, cw(c..) or ccw(c..) an arc to the next point about the centre after c; other vN are vias at no path point)
+3.3V: C1.1 C2.1 C3.1 C4.1 C7.1 C8.1 C19.1 C20.1 C22.1 C23.1 C24.1 C36.1 FB4.2 J2.4 MOD1.2 MOD2.1 MOD2.8 MOD3.8 MOD3.11 P2.1 P3.1 R10.1 R11.1 R17.1 R18.1 R19.1 R23.1 R24.1 R25.1 R26.1 | length 929.5
  Top Layer w15: J2.4 1514.25,1463.11 1529.02,1477.87 C24.1 C23.1 ; R26.1 C23.1 ; C22.1 1657,1439.42 1618.54,1477.87 C23.1 ; P2.1 2011.46,1066.46 C7.1 ; 2085.94,1010.94 2086.89,1010 ; C7.1@2085.94,1065.51 C7.1 ; C7.1@2098.08,1065.75 v2(2181.19,1065.75) ; C8.1 C7.1
  Bottom Layer w10: v2(2185.32,1010) 2191.04,1004.27 2227.7,1004.27 C3.1 C4.1 2313.68,998.54 2340.14,1025 MOD3.11
  Bottom Layer w15: v2@2173.86,1010 v2(2185.32,1010) ; MOD3.11 2468.43,1025 2493.43,1050 R24.1
  Bottom Layer w20: FB4.2@1651.66,2394.67 v1(1683.12,2394.67)
+3.3V_GPS: FB1.1 FB5.2
BATT: F1.1 pad.1@1476.38,3129.92 pad.1@1673.23,3129.92 pad.1@2657.48,3129.92 pad.1@2854.33,3129.92 | length 1659
  Bottom Layer w20: F1.1 2305,3035 2320,3050 2320,3110
  Bottom Layer w90: pad.1@1476.38,3129.92 1673.23,3129.92 1674.84,3131.53 1809.84,3131.53 1953.31,3275 2110,3275 2255,3130 pad.1@2874.02,3130
BUTTON: C39.1 MOD1.8 R19.2 R20.2
BUZZER: MOD1.26 R15.1
ENCODER_A: C38.1 MOD1.9 R18.2 R21.2
ENCODER_B: C37.1 MOD1.10 R17.2 R22.2
ESP_BOOT: MOD1.25 P3.5 R10.2
ESP_EN: MOD1.3 P3.6 R11.2
GND: C1.2 C2.2 C3.2 C4.2 C5.2 C6.2 C7.2 C8.2 C9.2 C10.2 C11.2 C12.2 C13.2 C14.2 C15.2 C16.2 C17.2 C18.2 C19.2 C20.2 C21.2 C22.2 C23.2 C24.2 C25.2 C26.2 C27.2 C28.2 C29.2 C30.2 C31.2 C32.2 C33.2 C34.2 C35.2 C36.2 C37.2 C38.2 C39.2 C40.2 D2.1 D3.1 ENC1.2 ENC1.5 ENC1.EP1 ENC1.EP2 J1.2 J2.6 J2.S0 MOD1.1 MOD1.15 MOD1.38 MOD1.EP1 MOD2.9 MOD2.11 MOD2.16 MOD3.1 MOD3.9 MOD3.10 MOD3.18 MOD3.20 MOD3.21 MOD3.22 MOD4.3 MOD4.9 MOD4.12 P1.2 P2.2 P3.2 pad.1@1476.38,3326.77 pad.1@1673.23,3326.77 pad.1@2657.48,3326.77 pad.1@2854.33,3326.77 Q2.2 R4.1 R5.1 R9.1 SHIELD2.1 U1.2 U1.4 U2.1 U3.4 U3.5 U4.3 U5.2 U5.3 | length 4609.9
  Top Layer w10: v1(490.52,1988.81) D3.1 ; v1(560.52,1988.81) D2.1
  Top Layer w15: J2.6 1514.25,1549.72 1529.02,1534.96 C24.2 C23.2 1618.54,1534.96 1657,1573.42 C22.2 1661.58,1575 1660,1576.58 v2(1660,1636.34) ; C7.2 2085.98,1123.54 2093.25,1130.81 2093.25,1131.79 2103.3,1141.85 2103.3,1166.41 v2(2110,1173.11) 2116.7,1166.41 2116.7,1141.85 2126.75,1131.79 2126.75,1130.81 2134.02,1123.54 C8.2
  Top Layer w20: Q2.2 v2(1014.76,2093.31)
  Bottom Layer w15: C5.2 v1(1577.56,2250) ; U1.4 1681.37,2192.5 1690.33,2183.54 C6.2 ; R9.1 v1(1986.46,2363.54) ; v1(1970,2575) 1986.46,2575 U3.4@2013.23,2601.77 ; v1(1975,2640) 1978.54,2640 U3.4 U3.4@2013.23,2601.77 ; v1(1980,2520) C18.2 2013.23,2521.77 U3.4@2013.23,2601.77 ; v1(1980,2835) 1980,2831.46 U3.5 ; v1(1990,2093.31) U4.3@1990,2137 ; v1(2064.86,2100) U5.3@2064.86,2143.69 ; v1(2085,2880) C13.2 ; v1(2086.18,2927.56) C14.2 ; U5.2 v1(2160,2242.7) ; v2(2180.32,940.55) 2308.47,940.55 2309.37,941.46 2313.63,937.2 2366.23,937.2 MOD3.10 ; C16.2 v1(2315,2515) ; R5.1 v1(2315,2565) ; R4.1 v1(2420,2805.91)
  Bottom Layer w20: v1(1028.88,2855.33) C32.2@1060.34,2855.33 ; v1(1028.88,2894.67) C32.2@1057.33,2894.67 ; C32.2@1057.33,2891.66 C32.2@1057.33,2894.67 ; v1(1057.33,2923.12) C32.2@1057.33,2894.67 ; C32.2@1060.34,2894.67 C32.2@1057.33,2894.67 ; C30.2 v1(1109.69,2750.16) ; C31.2 v1(1109.69,2800.16) ; C32.2@1096.67,2891.66 v1(1096.67,2923.12) ; v1(1139.69,2800.16) C28.2 ; v1(1140,2750) C29.2 ; C27.2@1153.33,2891.66 v1(1153.33,2923.12) ; C27.2@1189.66,2855.33 v1(1221.12,2855.33) ; C27.2@1189.66,2894.67 C27.2@1192.67,2894.67 ; C27.2@1192.67,2891.66 C27.2@1192.67,2894.67 ; v1(1192.67,2923.12) C27.2@1192.67,2894.67 ; v1(1221.12,2894.67) C27.2@1192.67,2894.67 ; v1(1375,2540) C9.2 ; v1(1385.33,2044.88) C35.2@1385.33,2076.34 ; v1(1424.67,2044.88) C35.2@1424.67,2076.34 ; v1(1460.33,2289.88) C33.2@1460.33,2321.34 ; v1(1499.67,2289.88) C33.2@1499.67,2321.34 ; U1.2@1540.79,2155.43 v1(1585,2155.43) ; C10.2 v1(1655,2540) ; v1(1635,2161.04) U1.4 v1(1635,2223.96) ; U2.1@1645.55,2660.63 v1(1645.55,2692.09) ; U2.1@1660,2590 v1(1691.46,2590) ; U2.1@1660,2625 v1(1691.46,2625) ; U2.1@1660.46,2660.63 v1(1691.91,2660.63) ; C6.2 v1(1691.31,2215) ; C34.2@1728.66,2450.33 v1(1760.12,2450.33) ; C34.2@1728.66,2489.67 v1(1760.12,2489.67) ; C40.2@1741.64,2238.66 v1(1741.64,2270.12) ; C40.2@1780.98,2238.66 v1(1780.98,2270.12) ; v1(1909.88,2425.33) C17.2@1941.34,2425.33 ; v1(1909.88,2464.67) C17.2@1941.34,2464.67 ; C15.2@2338.66,2425.33 v1(2370.12,2425.33) ; C15.2@2338.66,2464.67 v1(2370.12,2464.67)
  Bottom Layer w50: J1.2@2494.96,2524.02 2494.96,2293.34 2524.25,2264.06 2524.57,2264.06 2524.57,2231.38 MOD2.9 ; MOD2.11 2684.8,2231.38 2684.8,2324.39 2694.96,2334.54 MOD3.20 J1.2@2694.96,2524.02
  Bottom Layer w100: pad.1@1476.38,3326.77 1673.23,3326.77 1674.02,3327.56 1804.53,3327.56 1901.97,3425 2210,3425 2308.23,3326.77 2657.48,3326.77 2854.33,3326.77 pad.1@2874.02,3326.77
GPS_PPS: MOD1.6 MOD4.6
GPS_RXD: MOD1.27 MOD4.2
GPS_TXD: MOD1.28 MOD4.1
LED_DBG: MOD1.24 R12.2
LED_TX: MOD1.35 P3.3 R13.2
NetBUZ1_2: BUZ1.2 Q2.3 R14.1 | length 639.1
  Top Layer w20: R14.1 875.49,2004.19 934.04,2004.19 Q2.3 934.76,2184.13 1075.39,2324.76 BUZ1.2
NetC5_1: C5.1 C35.1 FB3.2 U1.1 U1.3 | length 233.5
  Bottom Layer w15: U1.3@1532.5,2195 U1.3 U1.3@1540,2187.5 ; U1.1 U1.1@1540,2122.5
  Bottom Layer w20: C35.1@1400,2232 C35.1 1427,2205 1473.54,2205 1483.54,2195 U1.3@1532.5,2195
  Bottom Layer w40: C35.1@1400,2232 FB3.2
NetC6_1: C6.1 C40.1 FB5.1 U1.5 | length 145.9
  Bottom Layer w20: U1.5 1637.5,2120 1683.87,2120 1690.33,2126.46 C6.1 1696.07,2121.69 1724.62,2121.69 1758.31,2088 C40.1
NetC9_1: C9.1 C33.1 FB2.2 U2.3 | length 240.6
  Bottom Layer w20: FB2.2 ccw(c1419.31,2499.31) 1419.31,2472 C33.1 1464.45,2487.55 U2.3
NetC10_1: C10.1 C34.1 FB4.1 U2.2 U2.4 | length 488.8
  Bottom Layer w20: U2.2 cw(c1527.34,2596.36) 1566.46,2596.36 C10.1 1566.46,2481.54 C34.1 FB4.1@1578,2395
  Bottom Layer w60: U2.2 U2.4
  other v1: 1542.8,2724.26 1571.4,2724.26 1542.1,2752.13 1570.7,2752.13 1541.4,2780 1570,2780
NetC11_1: C11.1 C12.1 C21.1 FB1.2 MOD4.4 MOD4.5 MOD4.10
NetC15_1: C15.1 C16.1 D1.1 R3.1 R5.2 U3.2 | length 445
  Bottom Layer w15: U3.2 2115,2521 C15.1@2188,2448 ; C15.1 C15.1@2188,2448 ; D1.1 2287.64,2635 2264.09,2611.46 R3.1 R5.2 C16.1 2219.19,2507.74 2219.19,2479.19 C15.1@2188,2448
NetD1_2: D1.2 R2.1 R4.2 | length 101.7
  Bottom Layer w10: D1.2 2288.54,2754.18 R2.1 R4.2
NetD2_2: D2.2 R12.1 | length 41.9
  Top Layer w10: D2.2 R12.1
NetD3_2: D3.2 R13.1 | length 42.5
  Top Layer w10: R13.1 489.21,2081.41 D3.2
NetENC1_1: ENC1.1 R21.1
NetENC1_3: ENC1.3 R22.1
NetENC1_4: ENC1.4 R20.1
NetQ1_1: Q1.1 R16.2 | length 312.6
  Int w10: v1(1940,2805.91) v1(1940,3020)
  Bottom Layer w10: R16.2 v1(1940,2805.91) ; v1(1940,3020) 1941.48,3018.52 1943.98,3018.52 Q1.1
NetQ2_1: Q2.1 R15.2 | length 53.4
  Top Layer w20: Q2.1 R15.2
NetR8_1: R8.1 R9.2 U4.1 | length 105.6
  Bottom Layer w10: U4.1@1952.6,2243.31 1952.6,2304.05 R9.2 R8.1
NetR16_1: R16.1 U3.1 | length 317.4
  Bottom Layer w15: R16.1 1985.9,2716.46 2002.35,2700 2146.46,2700 2165,2681.46 U3.1
RF: J1.1 MOD2.10 MOD3.19 | length 398
  Bottom Layer w50: J1.1 MOD3.19 2594.96,2334.55 2603.31,2326.2 2603.31,2231.38 MOD2.10
RF_CS: MOD1.29 MOD2.15 MOD3.15 R23.2 | length 1109.3
  Bottom Layer w8: v2(2508.43,1603.27) 2508.43,1600 2535.71,1572.72
  Bottom Layer w10: MOD3.15 2387.99,1425 2535.71,1572.72 2998.39,2035.39 MOD2.15
RF_DIO1: MOD1.4
RF_DIO2: MOD1.5
RF_IRQ: MOD1.7 MOD2.2 MOD3.7 | length 672
  Bottom Layer w10: MOD2.2 2998.39,1195.67 3069.05,1125 MOD3.7
RF_MISO: MOD1.31 MOD2.13 MOD3.13 R24.2 | length 1736
  Bottom Layer w10: v2(2278.43,1280) 2289.25,1280 2344.25,1225 MOD3.13@2348.43,1225 ; R24.2 2493.43,1200 2468.43,1225 MOD3.13 MOD3.13@2348.43,1225 ; MOD2.13 2840.91,2152.48 2798.43,2110 2479.37,2110 2293.43,1924.06 2293.43,1280 MOD3.13@2348.43,1225
RF_MOSI: MOD1.37 MOD2.14 MOD3.14 | length 2693.8
  Bottom Layer w8: 1906.73,1153.27 1926.01,1133.99 1926.01,978.99 ; 2024.43,978.99 2138.43,865 2428.43,865 2568.43,1005 2568.43,1280 2523.43,1325 MOD3.14
  Bottom Layer w10: MOD3.14 2358.74,1325 2309.37,1374.37 2309.37,1844.49 2539.88,2075 2848.43,2075 2919.65,2146.22 MOD2.14
RF_SCK: MOD1.30 MOD2.12 MOD3.12 | length 1591.6
  Bottom Layer w8: 2275.16,1503.27 2278.43,1500
  Bottom Layer w10: MOD3.12 2371.69,1125 2243.43,1253.27 2243.43,1315.2 2278.43,1350.2 2278.43,1500 2278.43,2024.23 2379.2,2125 2733.02,2125 2762.17,2154.14 MOD2.12
RXD0: MOD1.34 P3.4
RXEN: MOD1.12 MOD3.17
SCL: MOD1.36 P2.3 | length 177
  Bottom Layer w6: MOD1.36 1947.36,1202.36 P2.3
SD_CS: J2.2 MOD1.23 R26.2 | length 118
  Top Layer w15: J2.2 1465.06,1374.82 1578.33,1374.82 R26.2
SD_MISO: J2.7 MOD1.14 R25.2 | length 118.7
  Top Layer w15: J2.7 1465.85,1590.57 1577.54,1590.57 R25.2
SD_MOSI: J2.3 MOD1.16
SD_SCK: J2.5 MOD1.13
SDA: MOD1.33 P2.4 | length 162.3
  Bottom Layer w6: MOD1.33 1838.07,1345 P2.4
TXEN: MOD1.11 MOD3.16
Vdcdc: C26.1 C30.1 C31.1 C32.1 FB2.1 FB3.1 P1.3 | length 1320.8
  Bottom Layer w20: C32.1 943,2811.87 954.72,2800.16 C31.1 1022.91,2798.39 1022.91,2750.16 1022.91,2671.93 P1.3
  Bottom Layer w40: C32.1 943,2878 955,2890 958,2890 1007.03,2939.03 1007.03,3073.53 1112.88,3179.37 1171.5,3179.37 C26.1 ; P1.3 1024.69,2575.32 1180,2420 FB2.1 FB3.1
Vin: BUZ1.1 C25.1 C27.1 C28.1 C29.1 P1.1 Q1.3 R14.2 | length 2208.9
  Top Layer w20: R14.2 874.76,2224.45 BUZ1.1
  Top Layer w50: BUZ1.1 975.08,2490.39 1043.74,2559.06 1192.67,2559.06 1224.69,2591.07 P1.1
  Bottom Layer w20: P1.1 1226.46,2671.93 1226.46,2798.39 C28.1 1228.23,2801.14 1232.99,2805.91 1289.76,2805.91 1305.57,2821.72 1305.57,2873.57 C27.1 ; Q1.3 2025,3027.35
  Bottom Layer w30: C27.1 1307,2878 1324,2895 1327,2895 1392,2960 1709.2,2960 1813.87,2855.33 1935.33,2855.33 1975,2895 Q1.3
  Bottom Layer w50: 2025,3027.35 C25.1
Vin_opamp: C13.1 C14.1 R1.1 R2.2 R3.2 R6.2 U3.6 U3.8 | length 1030.1
  Int w10: v1(2160,2345) 2231.46,2416.46 v1(2231.46,2724.26)
  Bottom Layer w10: U3.6 2068.36,2793.1 2068.36,2736.64 2080.74,2724.26 2155,2724.26 2165,2734.26 U3.8 ; R1.1 2168.36,2969.82 2168.36,2799.82 U3.8 ; R3.2 2231.46,2673.54 v1(2231.46,2724.26) R2.2 2222.01,2796.46 U3.8
Vin_unsafe: F1.2 Q1.2 R1.2 | length 213.4
  Bottom Layer w10: Q1.2@2065,2975 R1.2
  Bottom Layer w20: Q1.2@2065,2975 2068.33,2978.33 2068.33,3007.59 2095.74,3035 F1.2
Vref: C17.1 C18.1 R6.1 R8.2 U3.3 U4.2 U5.1 | length 434.1
  Bottom Layer w10: U4.2@2027.4,2243.31 2034.21,2250.12 2034.21,2286.14 2053.54,2305.47 R8.2 R6.1 2101.46,2435.54 C17.1
  Bottom Layer w15: U3.3 2065,2520 2065,2475 2092,2448 C17.1
pads on no net: J2.1 J2.8 J2.CD J2.H MOD1.17 MOD1.18 MOD1.19 MOD1.20 MOD1.21 MOD1.22 MOD1.32 MOD2.3 MOD2.4 MOD2.5 MOD2.6 MOD2.7 MOD3.2 MOD3.3 MOD3.4 MOD3.5 MOD3.6 MOD4.7 MOD4.8 MOD4.11 P2.5 P2.6 U3.7

## Polygon pours and split planes (outlines as drawn)
GND on GND (split plane): 3720.06,807.5 807.5,807.5 807.5,3720.06 3720.06,3720.06

## Silkscreen, mask and mechanical layers (free items; w line width, h text height)
Bottom Overlay:
  lines w10: 919.96,2070.55 919.96,2720.16 1329.41,2720.16 1329.41,2070.55 919.96,2070.55
Mechanical 1:
  the board outline again, w10

## Text inside footprints (layer, text, board x,y; h text height)
BUZ1: Mechanical 17 "d" at 1134.69,2309.76 h60 r180; Mechanical 19 "-" at 1129.69,2309.76 h60 r180
C1: Mechanical 17 "d" at 3062.6,1383.94 h10 r180; Mechanical 19 "-" at 3062.6,1383.94 h10 r180
C2: Mechanical 17 "d" at 3062.6,1338.27 h10 r180; Mechanical 19 "-" at 3062.6,1338.27 h10 r180
C3: Mechanical 17 "d" at 2238.43,1005 h10 r90; Mechanical 19 "-" at 2238.43,1005 h10 r90
C4: Mechanical 17 "d" at 2288.43,1005 h10 r90; Mechanical 19 "-" at 2288.43,1005 h10 r90
C5: Mechanical 17 "d" at 1470,2255 h10 r180; Mechanical 19 "-" at 1470,2255 h10 r180
C6: Mechanical 17 "d" at 1686.31,2120 h10 r270; Mechanical 19 "-" at 1686.31,2120 h10 r270
C7: Mechanical 17 "d" at 2090,1060 h10 r90; Mechanical 19 "-" at 2090,1060 h10 r90
C8: Mechanical 17 "d" at 2140,1060 h10 r90; Mechanical 19 "-" at 2140,1060 h10 r90
C9: Mechanical 17 "d" at 1470,2535 h10; Mechanical 19 "-" at 1470,2535 h10
C10: Mechanical 17 "d" at 1560,2545 h10 r180; Mechanical 19 "-" at 1560,2545 h10 r180
C11: Mechanical 17 "d" at 3601.46,1585.04 h10 r270; Mechanical 19 "-" at 3601.46,1585.04 h10 r270
C12: Mechanical 17 "d" at 3551.46,1585.04 h10 r270; Mechanical 19 "-" at 3551.46,1585.04 h10 r270
C13: Mechanical 17 "d" at 2180,2875 h10; Mechanical 19 "-" at 2180,2875 h10
C14: Mechanical 17 "d" at 2181.18,2922.56 h10; Mechanical 19 "-" at 2181.18,2922.56 h10
C15: Mechanical 17 "d" at 2190,2450 h15 r180; Mechanical 19 "-" at 2190,2450 h15 r180
C16: Mechanical 17 "d" at 2220,2520 h10 r180; Mechanical 19 "-" at 2220,2520 h10 r180
C17: Mechanical 17 "d" at 2090,2440 h15; Mechanical 19 "-" at 2090,2440 h15
C18: Mechanical 17 "d" at 2075,2515 h10; Mechanical 19 "-" at 2075,2515 h10
C19: Mechanical 17 "d" at 985,1160 h10 r90; Mechanical 19 "-" at 985,1160 h10 r90
C20: Mechanical 17 "d" at 1035,1160 h10 r90; Mechanical 19 "-" at 1035,1160 h10 r90
C21: Mechanical 17 "d" at 3591.02,1519.49 h15 r90; Mechanical 19 "-" at 3591.02,1519.49 h15 r90
C22: Mechanical 17 "d" at 1665,1441.42 h15 r90; Mechanical 19 "-" at 1665,1441.42 h15 r90
C23: Mechanical 17 "d" at 1585,1471.42 h10 r90; Mechanical 19 "-" at 1585,1471.42 h10 r90
C24: Mechanical 17 "d" at 1535,1471.42 h10 r90; Mechanical 19 "-" at 1535,1471.42 h10 r90
C25: Mechanical 17 "d" at 2055,3055 h60 r90; Mechanical 19 "-" at 2055,3055 h60 r90
C26: Mechanical 17 "d" at 1211.1,3067.4 h60 r90; Mechanical 19 "-" at 1211.1,3067.4 h60 r90
C27: Mechanical 17 "d" at 1305,2870 h15; Mechanical 19 "-" at 1305,2870 h15
C28: Mechanical 17 "d" at 1234.69,2795.16 h10; Mechanical 19 "-" at 1234.69,2795.16 h10
C29: Mechanical 17 "d" at 1235,2745 h10; Mechanical 19 "-" at 1235,2745 h10
C30: Mechanical 17 "d" at 1014.69,2755.16 h10 r180; Mechanical 19 "-" at 1014.69,2755.16 h10 r180
C31: Mechanical 17 "d" at 1014.69,2805.16 h10 r180; Mechanical 19 "-" at 1014.69,2805.16 h10 r180
C32: Mechanical 17 "d" at 945,2880 h15 r180; Mechanical 19 "-" at 945,2880 h15 r180
C33: Mechanical 17 "d" at 1485,2470 h15 r90; Mechanical 19 "-" at 1485,2470 h15 r90
C34: Mechanical 17 "d" at 1580,2475 h15 r180; Mechanical 19 "-" at 1580,2475 h15 r180
C35: Mechanical 17 "d" at 1410,2225 h15 r90; Mechanical 19 "-" at 1410,2225 h15 r90
C36: Mechanical 17 "d" at 901.92,1255.19 h15 r90; Mechanical 19 "-" at 901.92,1255.19 h15 r90
C37: Mechanical 17 "d" at 4244.13,2570.59 h10 r90; Mechanical 19 "-" at 4244.13,2570.59 h10 r90
C38: Mechanical 17 "d" at 4244.13,2465.59 h10 r90; Mechanical 19 "-" at 4244.13,2465.59 h10 r90
C39: Mechanical 17 "d" at 4194.13,2685.59 h10 r90; Mechanical 19 "-" at 4194.13,2685.59 h10 r90
C40: Mechanical 17 "d" at 1756.31,2090 h15 r270; Mechanical 19 "-" at 1756.31,2090 h15 r270
D1: Mechanical 17 "d" at 2273.54,2632.09 h15 r270; Mechanical 19 "-" at 2273.54,2632.09 h15 r270
D2: Mechanical 17 "d" at 565.51,2015.58 h10 r90; Mechanical 19 "-" at 565.51,2015.58 h10 r90
D3: Mechanical 17 "d" at 495.51,2015.58 h10 r90; Mechanical 19 "-" at 495.51,2015.58 h10 r90
ENC1: Mechanical 17 "d" at 3363.74,3041.5 h60 r270; Mechanical 19 "-" at 3363.74,3046.5 h60 r270
F1: Mechanical 17 "d" at 2250,3025 h10; Mechanical 19 "-" at 2250,3025 h10
FB1: Mechanical 17 "d" at 3671.02,1374.49 h10 r270; Mechanical 19 "-" at 3651.02,1374.49 h10 r270
FB2: Mechanical 17 "d" at 1405,2420 h10 r270; Mechanical 19 "-" at 1385,2420 h10 r270
FB3: Mechanical 17 "d" at 1395,2360 h10 r90; Mechanical 19 "-" at 1415,2360 h10 r90
FB4: Mechanical 17 "d" at 1580,2390 h10 r180; Mechanical 19 "-" at 1580,2410 h10 r180
FB5: Mechanical 17 "d" at 1635.08,2056.94 h10; Mechanical 19 "-" at 1635.08,2036.94 h10
J1: Mechanical 17 "d" at 2584.96,2734.02 h20 r270; Mechanical 19 "-" at 2584.96,2704.02 h20 r270
MOD1: Mechanical 17 "d" at 1456.38,1447.36 h50 r180; Mechanical 19 "-" at 1456.38,1447.36 h50 r180
MOD2: Mechanical 17 "d" at 2796.54,1612.05 h60 r270; Mechanical 19 "-" at 2796.54,1612.05 h60 r270
MOD3: Mechanical 17 "d" at 2845.87,1196.81 h60 r270; Mechanical 19 "-" at 2845.87,1196.81 h60 r270
MOD4: Mechanical 17 "d" at 2846.46,1452.76 h60; Mechanical 19 "-" at 2842.52,1437.01 h60
P1: Mechanical 17 "d" at 1269.69,2640.16 h60; Mechanical 19 "-" at 1269.69,2640.16 h60
P2: Mechanical 17 "d" at 2020,975 h60 r90; Mechanical 19 "-" at 2025,1035 h60 r90
P3: Mechanical 17 "d" at 2174.72,2020.39 h60 r270; Mechanical 19 "-" at 2169.72,1960.39 h60 r270
Q1: Mechanical 17 "d" at 1975,2940 h20 r180; Mechanical 19 "-" at 1975,2940 h20 r180
Q2: Mechanical 17 "d" at 979.76,1953.46 h20 r90; Mechanical 19 "-" at 979.76,1953.46 h20 r90
R1: Mechanical 17 "d" at 2175,2980 h10; Mechanical 19 "-" at 2175,2960 h10
R2: Mechanical 17 "d" at 2290,2810.91 h10; Mechanical 19 "-" at 2290,2790.91 h10
R3: Mechanical 17 "d" at 2231.46,2610 h10 r270; Mechanical 19 "-" at 2211.46,2610 h10 r270
R4: Mechanical 17 "d" at 2390,2810.91 h10; Mechanical 19 "-" at 2390,2790.91 h10
R5: Mechanical 17 "d" at 2285,2570 h10; Mechanical 19 "-" at 2285,2550 h10
R6: Mechanical 17 "d" at 2100,2301.46 h10 r180; Mechanical 19 "-" at 2100,2321.46 h10 r180
R8: Mechanical 17 "d" at 1995,2301.46 h10 r180; Mechanical 19 "-" at 1995,2321.46 h10 r180
R9: Mechanical 17 "d" at 1950,2365 h10 r90; Mechanical 19 "-" at 1970,2365 h10 r90
R10: Mechanical 17 "d" at 4012.83,2656.1 h10 r270; Mechanical 19 "-" at 3992.83,2656.1 h10 r270
R11: Mechanical 17 "d" at 3952.83,2636.1 h10 r90; Mechanical 19 "-" at 3972.83,2636.1 h10 r90
R12: Mechanical 17 "d" at 555.51,2120.58 h10 r90; Mechanical 19 "-" at 575.51,2120.58 h10 r90
R13: Mechanical 17 "d" at 484.21,2120.58 h10 r90; Mechanical 19 "-" at 504.21,2120.58 h10 r90
R14: Mechanical 17 "d" at 869.76,2003.46 h10 r90; Mechanical 19 "-" at 889.76,2003.46 h10 r90
R15: Mechanical 17 "d" at 1126.67,1960.96 h10 r180; Mechanical 19 "-" at 1126.67,1980.96 h10 r180
R16: Mechanical 17 "d" at 1945,2715 h10 r270; Mechanical 19 "-" at 1925,2715 h10 r270
R17: Mechanical 17 "d" at 4194.13,2635.59 h10 r270; Mechanical 19 "-" at 4174.13,2635.59 h10 r270
R18: Mechanical 17 "d" at 4194.13,2530.59 h10 r270; Mechanical 19 "-" at 4174.13,2530.59 h10 r270
R19: Mechanical 17 "d" at 4244.13,2750.59 h10 r270; Mechanical 19 "-" at 4224.13,2750.59 h10 r270
R20: Mechanical 17 "d" at 4339.13,2685.59 h10 r180; Mechanical 19 "-" at 4339.13,2705.59 h10 r180
R21: Mechanical 17 "d" at 4339.13,2465.59 h10 r180; Mechanical 19 "-" at 4339.13,2485.59 h10 r180
R22: Mechanical 17 "d" at 4339.13,2572.05 h10 r180; Mechanical 19 "-" at 4339.13,2592.05 h10 r180
R23: Mechanical 17 "d" at 2076.89,1645 h10 r90; Mechanical 19 "-" at 2096.89,1645 h10 r90
R24: Mechanical 17 "d" at 2498.43,1095 h10 r270; Mechanical 19 "-" at 2478.43,1095 h10 r270
R25: Mechanical 17 "d" at 1585,1646.65 h10 r270; Mechanical 19 "-" at 1565,1646.65 h10 r270
R26: Mechanical 17 "d" at 1585,1431.69 h10 r270; Mechanical 19 "-" at 1565,1431.69 h10 r270
SHIELD1: Mechanical 17 "d" at 4649.1,5869.57 h60; Mechanical 19 "-" at 4649.1,5879.57 h60
SHIELD2: Mechanical 17 "d" at 1336.07,2359.64 h60 r180; Mechanical 19 "-" at 1336.07,2349.64 h60 r180
U1: Mechanical 17 "d" at 1580,2100 h10 r270; Mechanical 19 "-" at 1580,2100 h10 r270
U2: Mechanical 17 "d" at 1670,2745 h25; Mechanical 19 "-" at 1670,2745 h25
U3: Mechanical 17 "d" at 2075,2560 h25 r270; Mechanical 19 "-" at 2080,2650 h25 r270